# Altium PCB TIDA-010056.PcbDoc (part 1 of 4)
Units mil, origin at the board's own origin, x right, y up, seen from the top; angles counter-clockwise.
Board outline 2716.54 x 2756 mil, 4 copper layers (Top Layer, GND, PWR, Bottom Layer), stack 63.2 mil thick; 152 components, 93 nets, 418 pads, 601 vias.
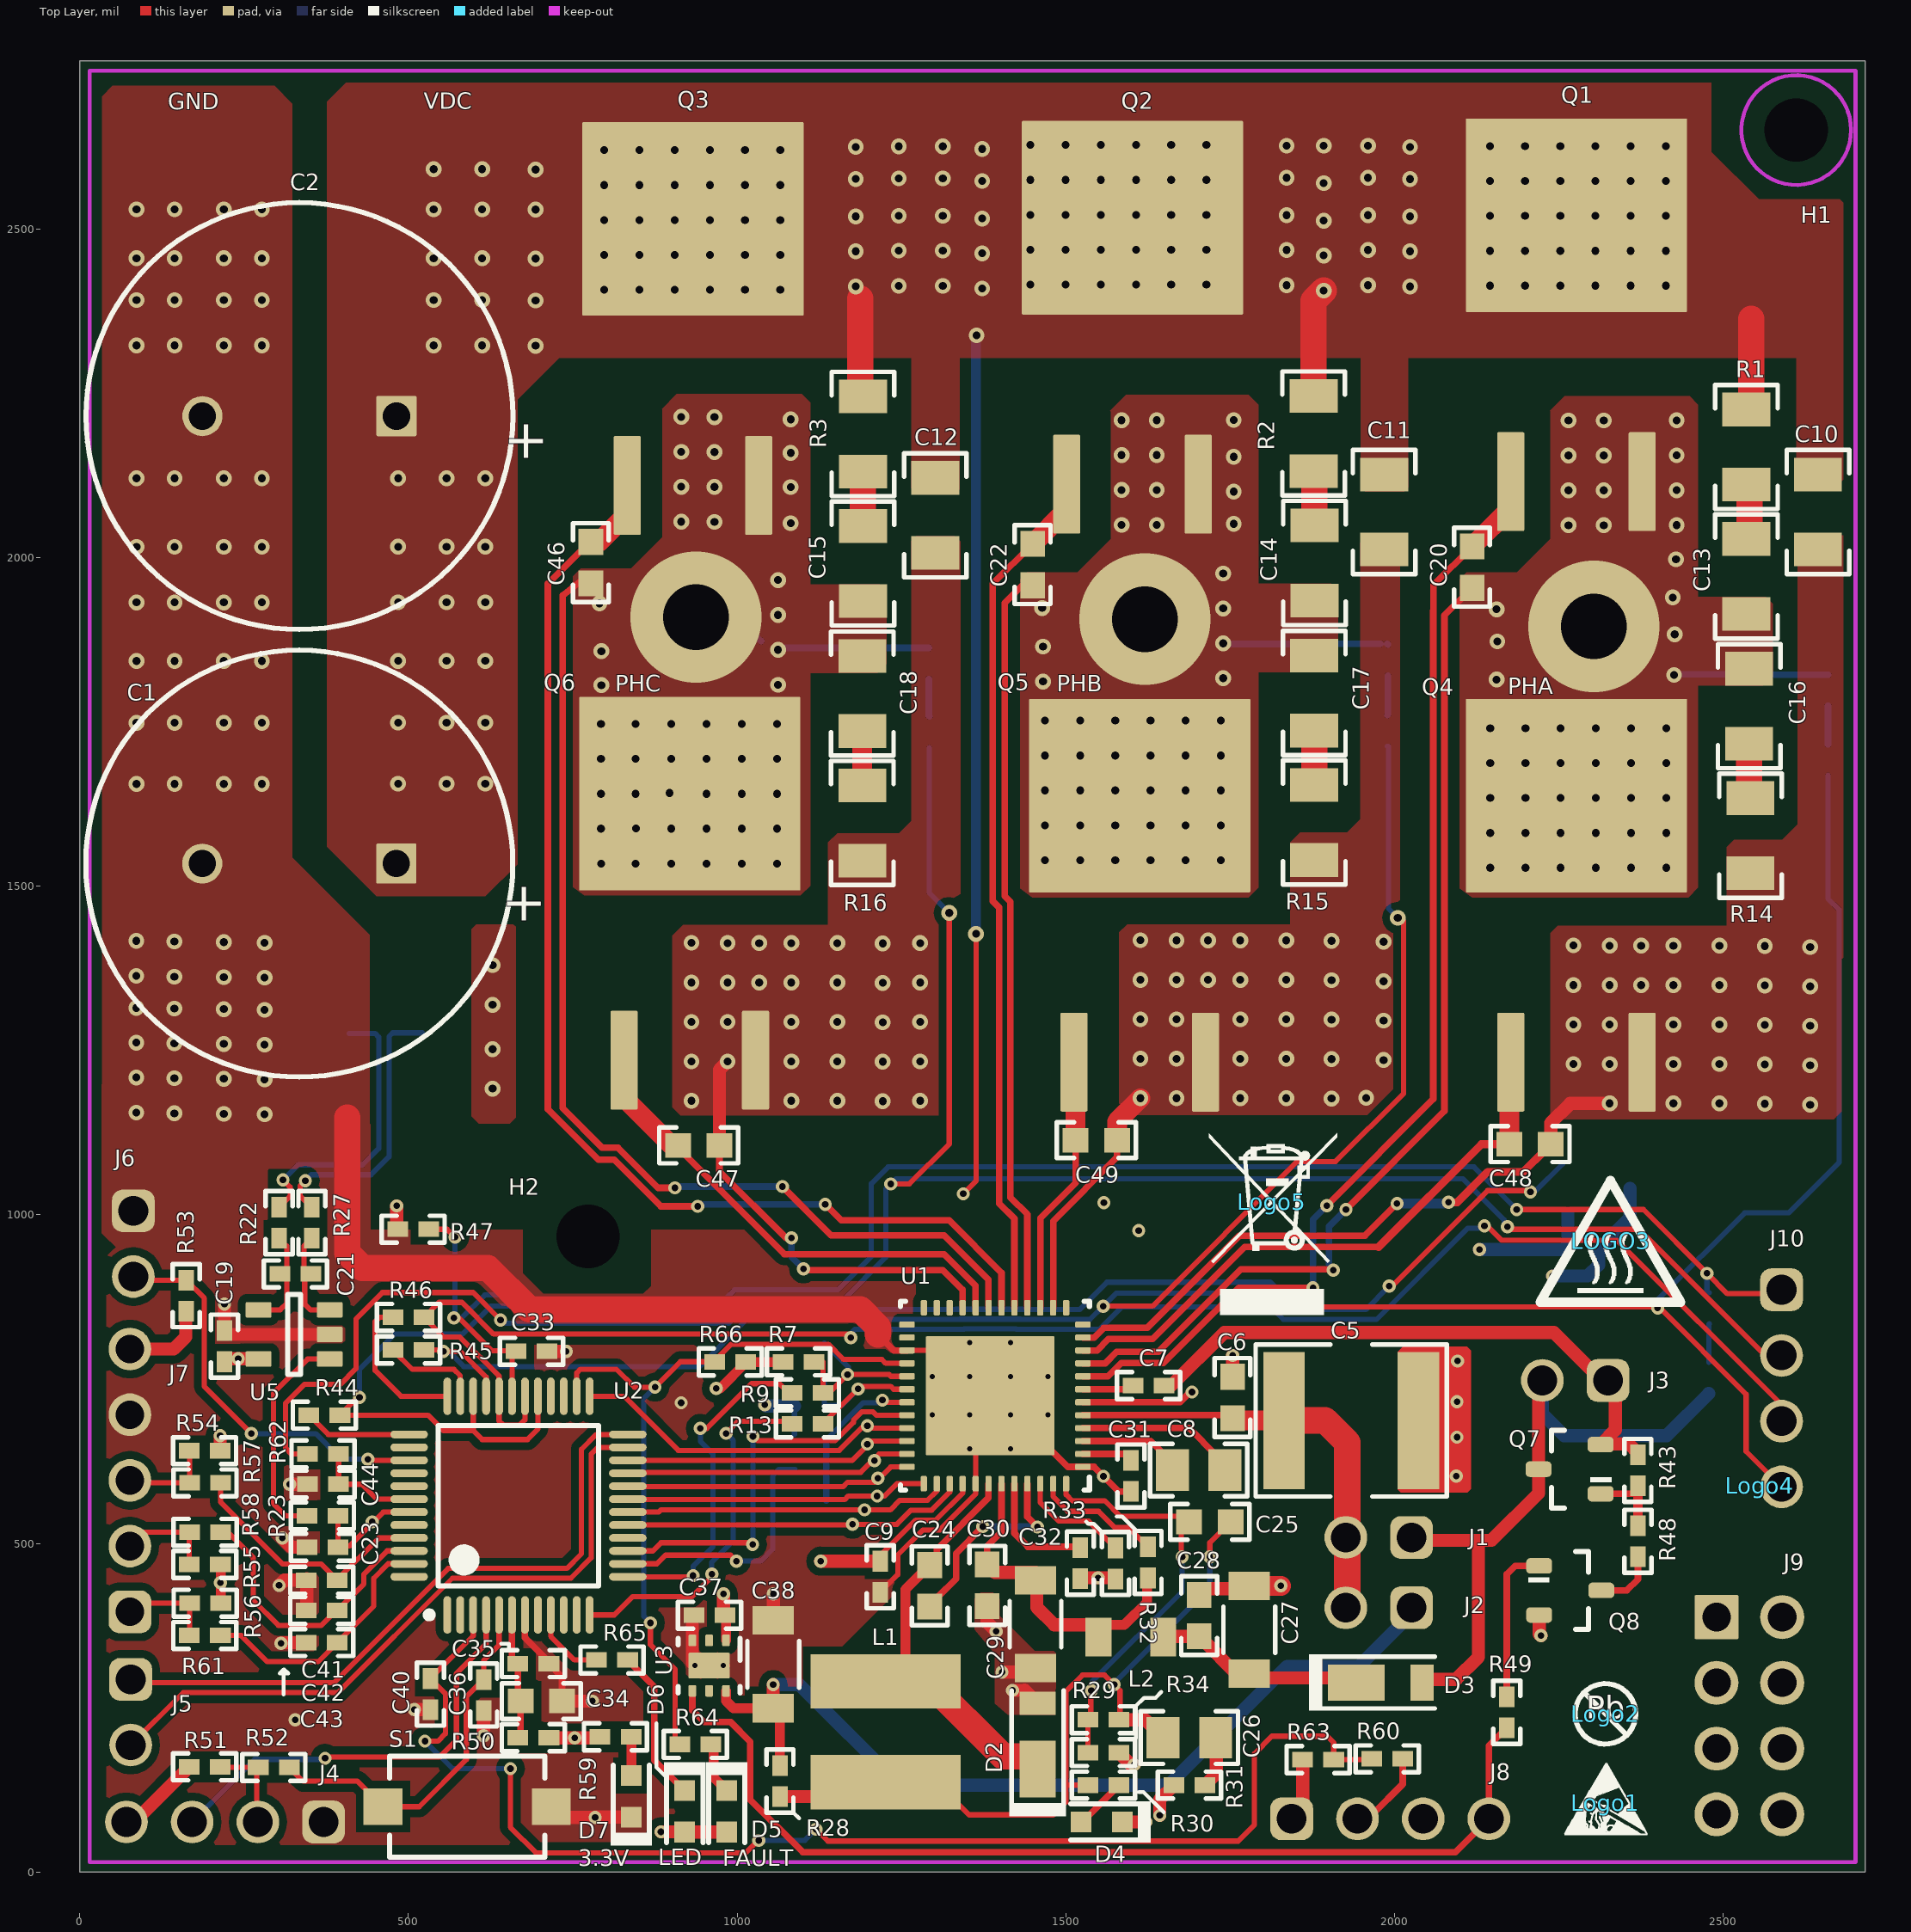
[diagram p0: Top Layer view]
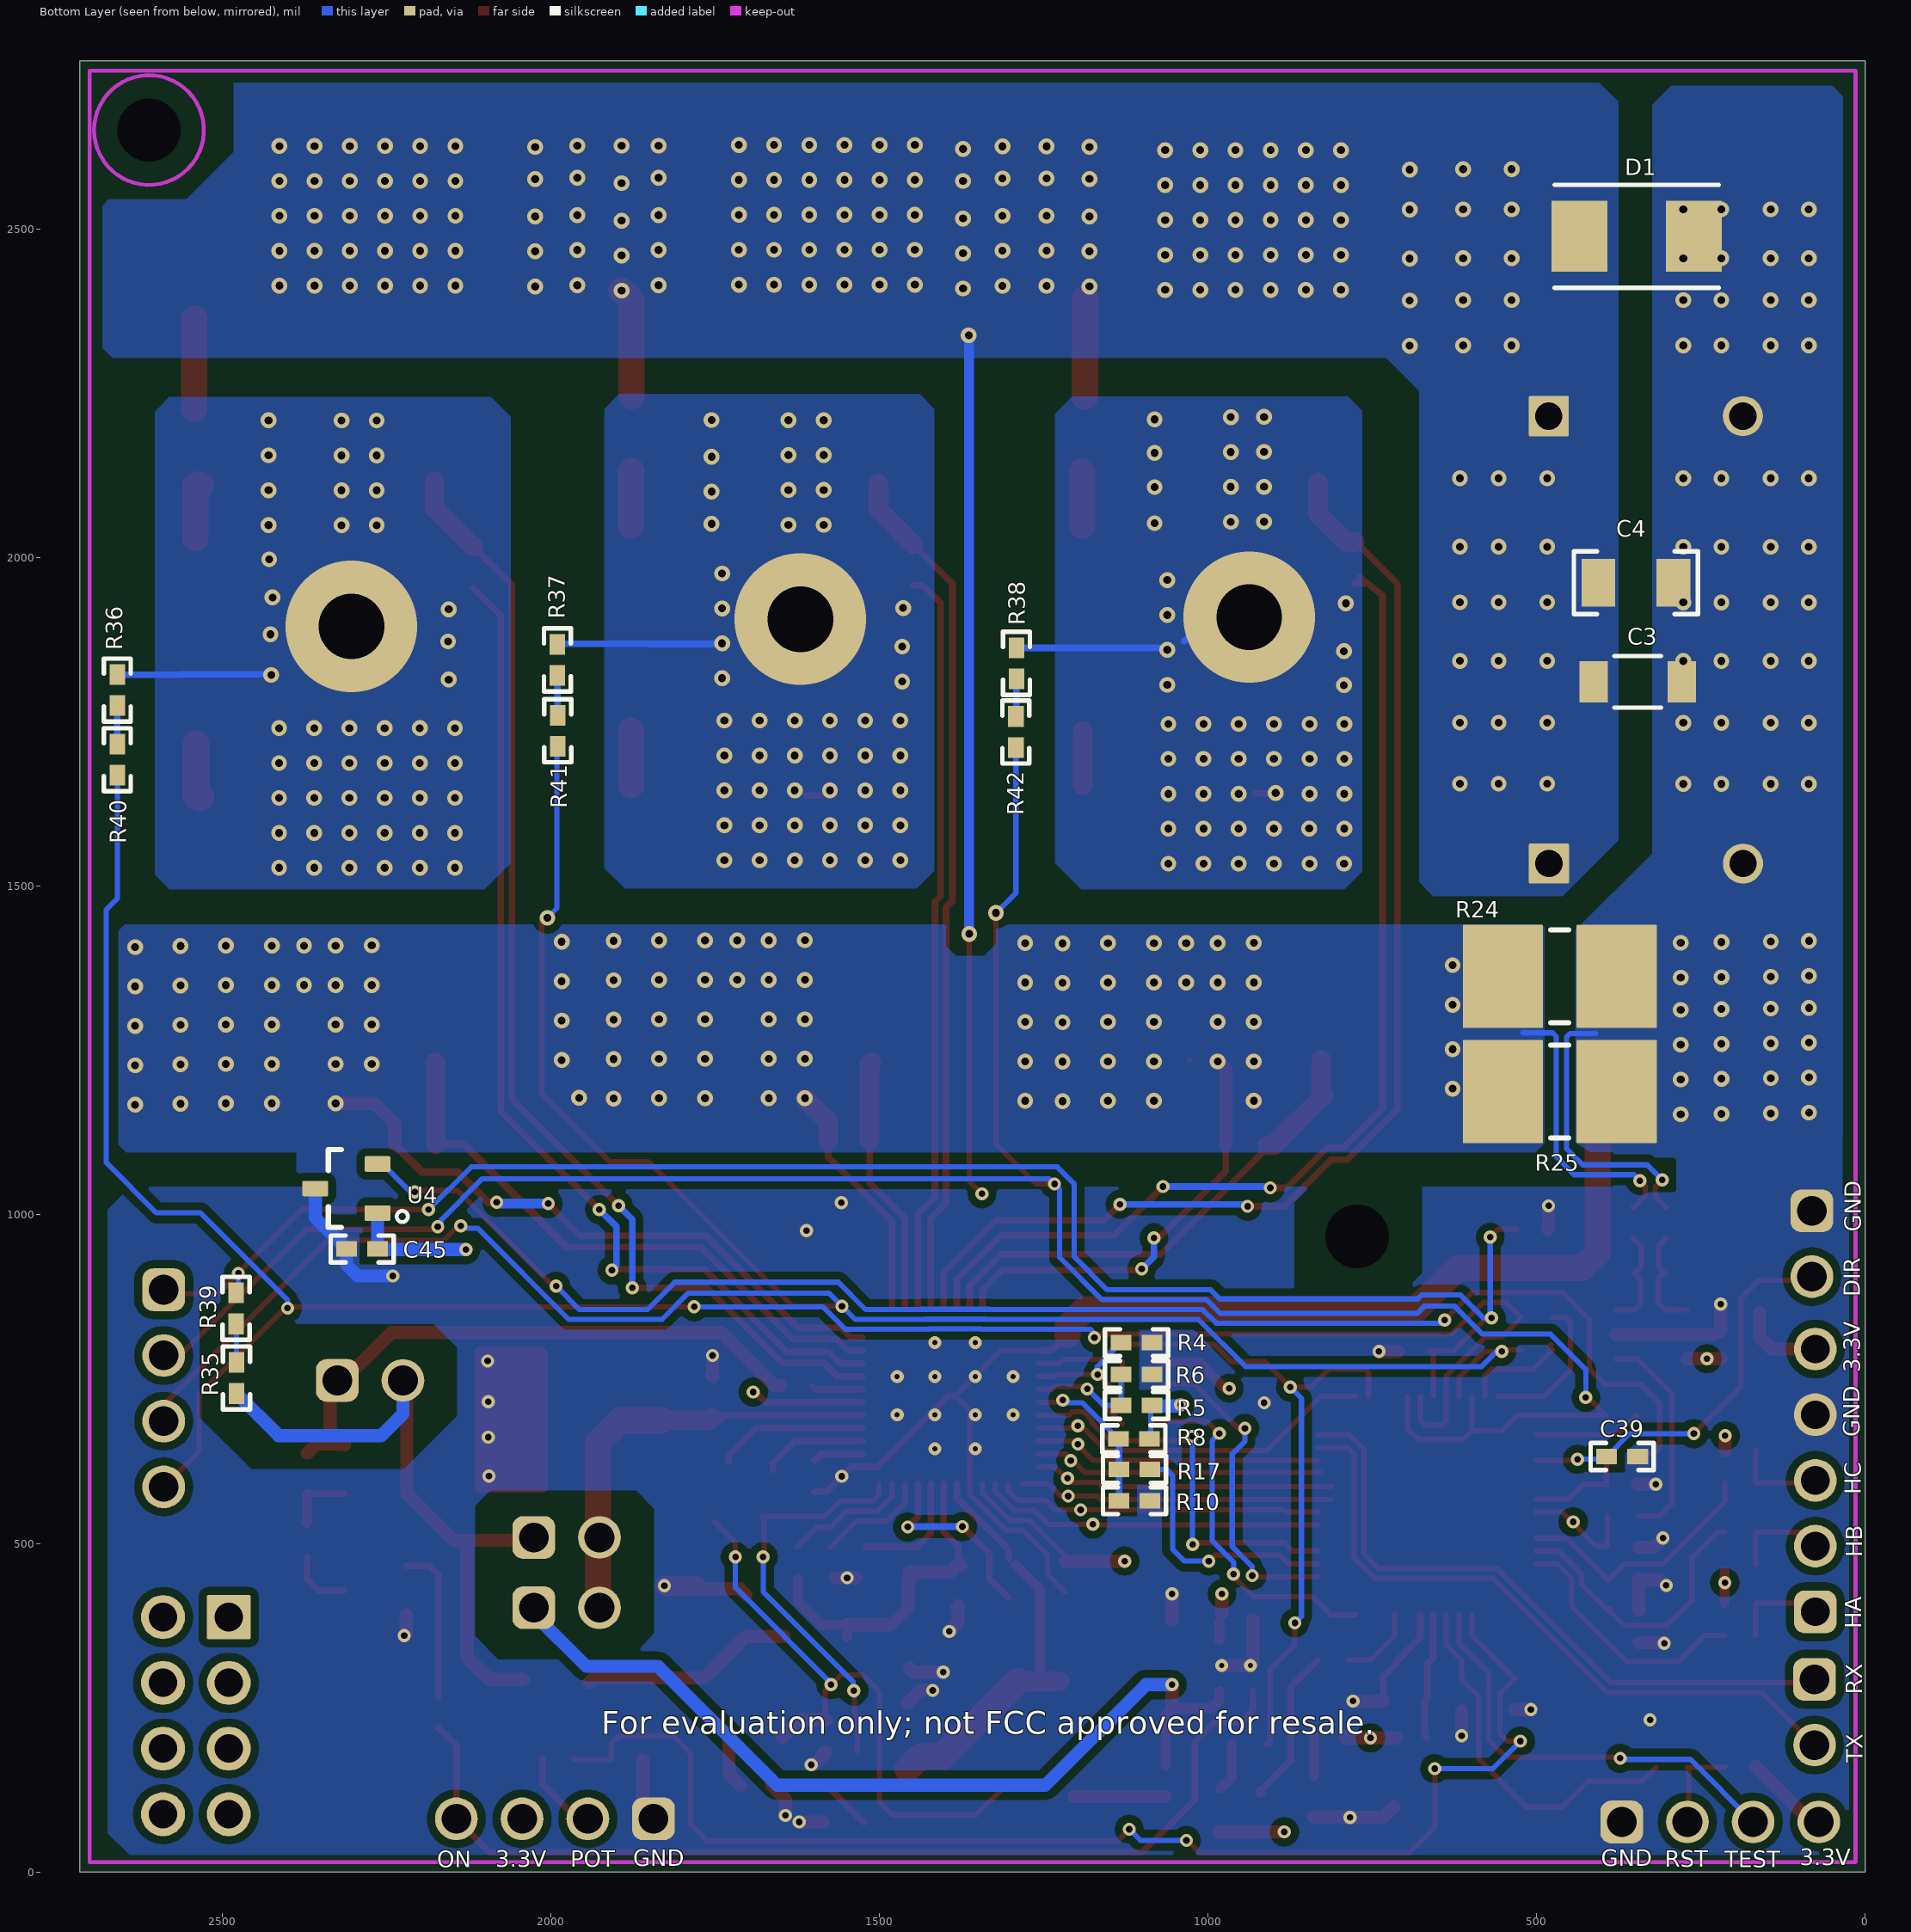
[diagram p1: Bottom Layer view, seen from below]
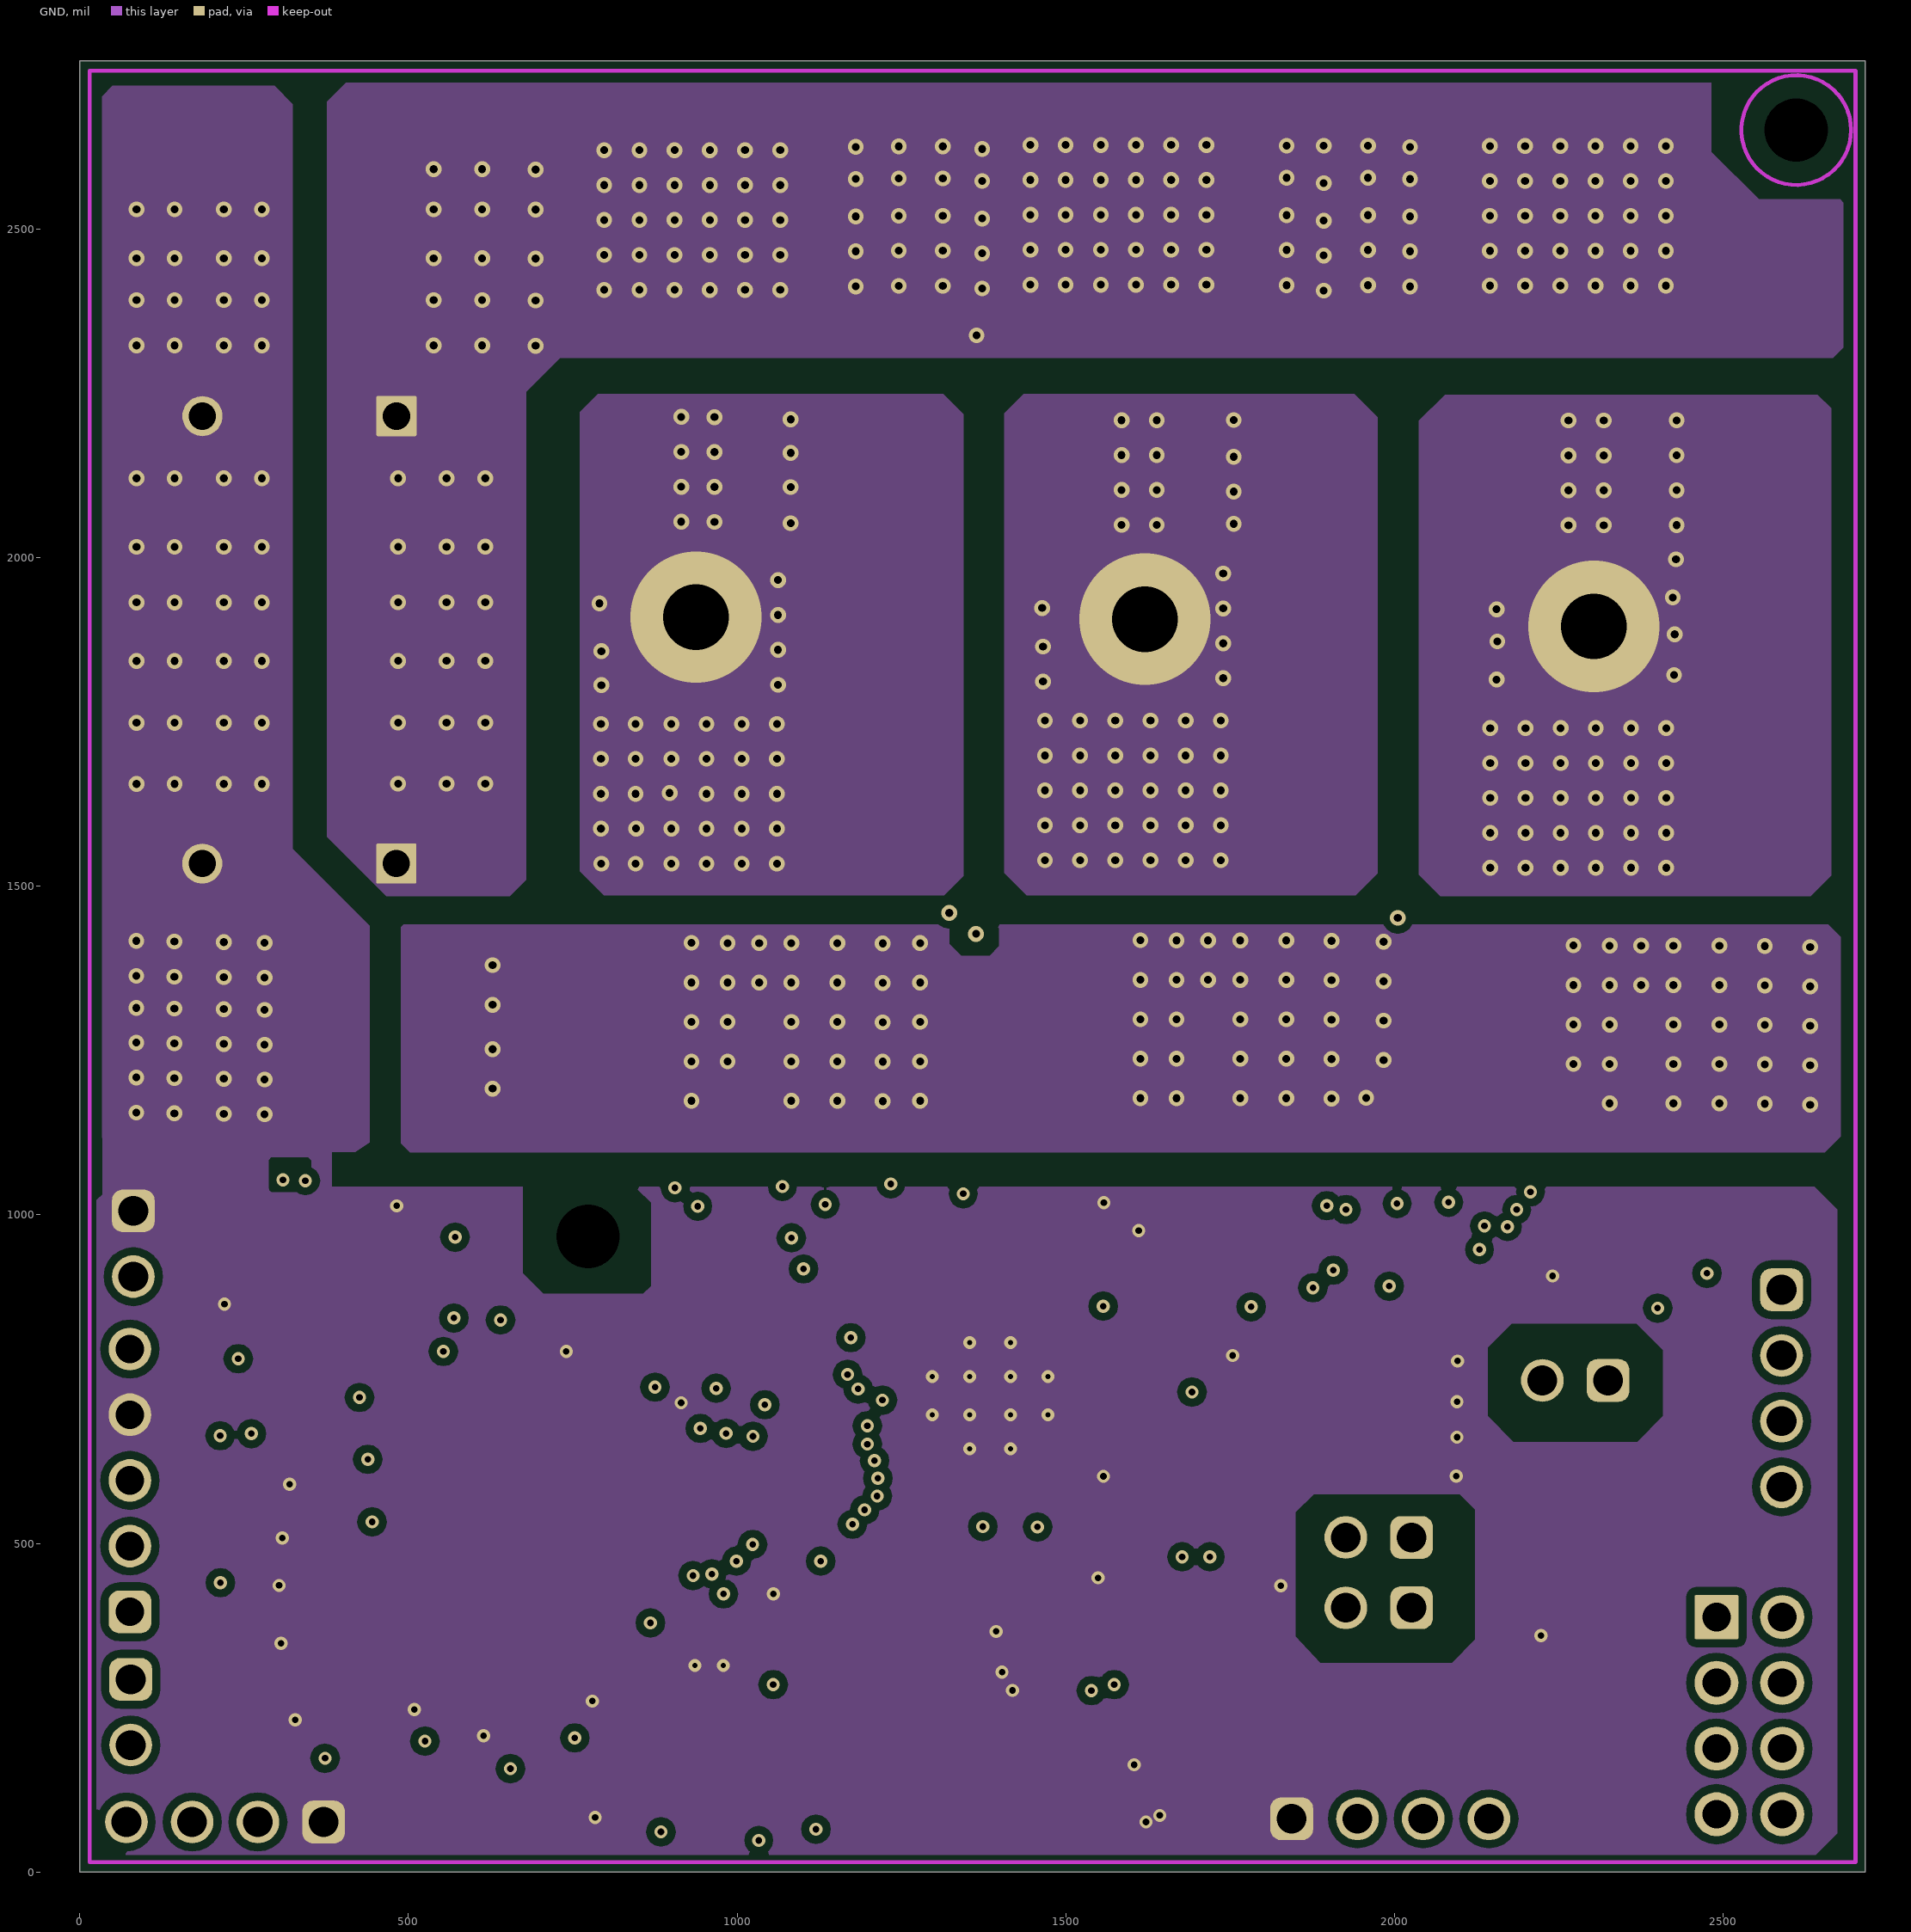
[diagram p2: GND]
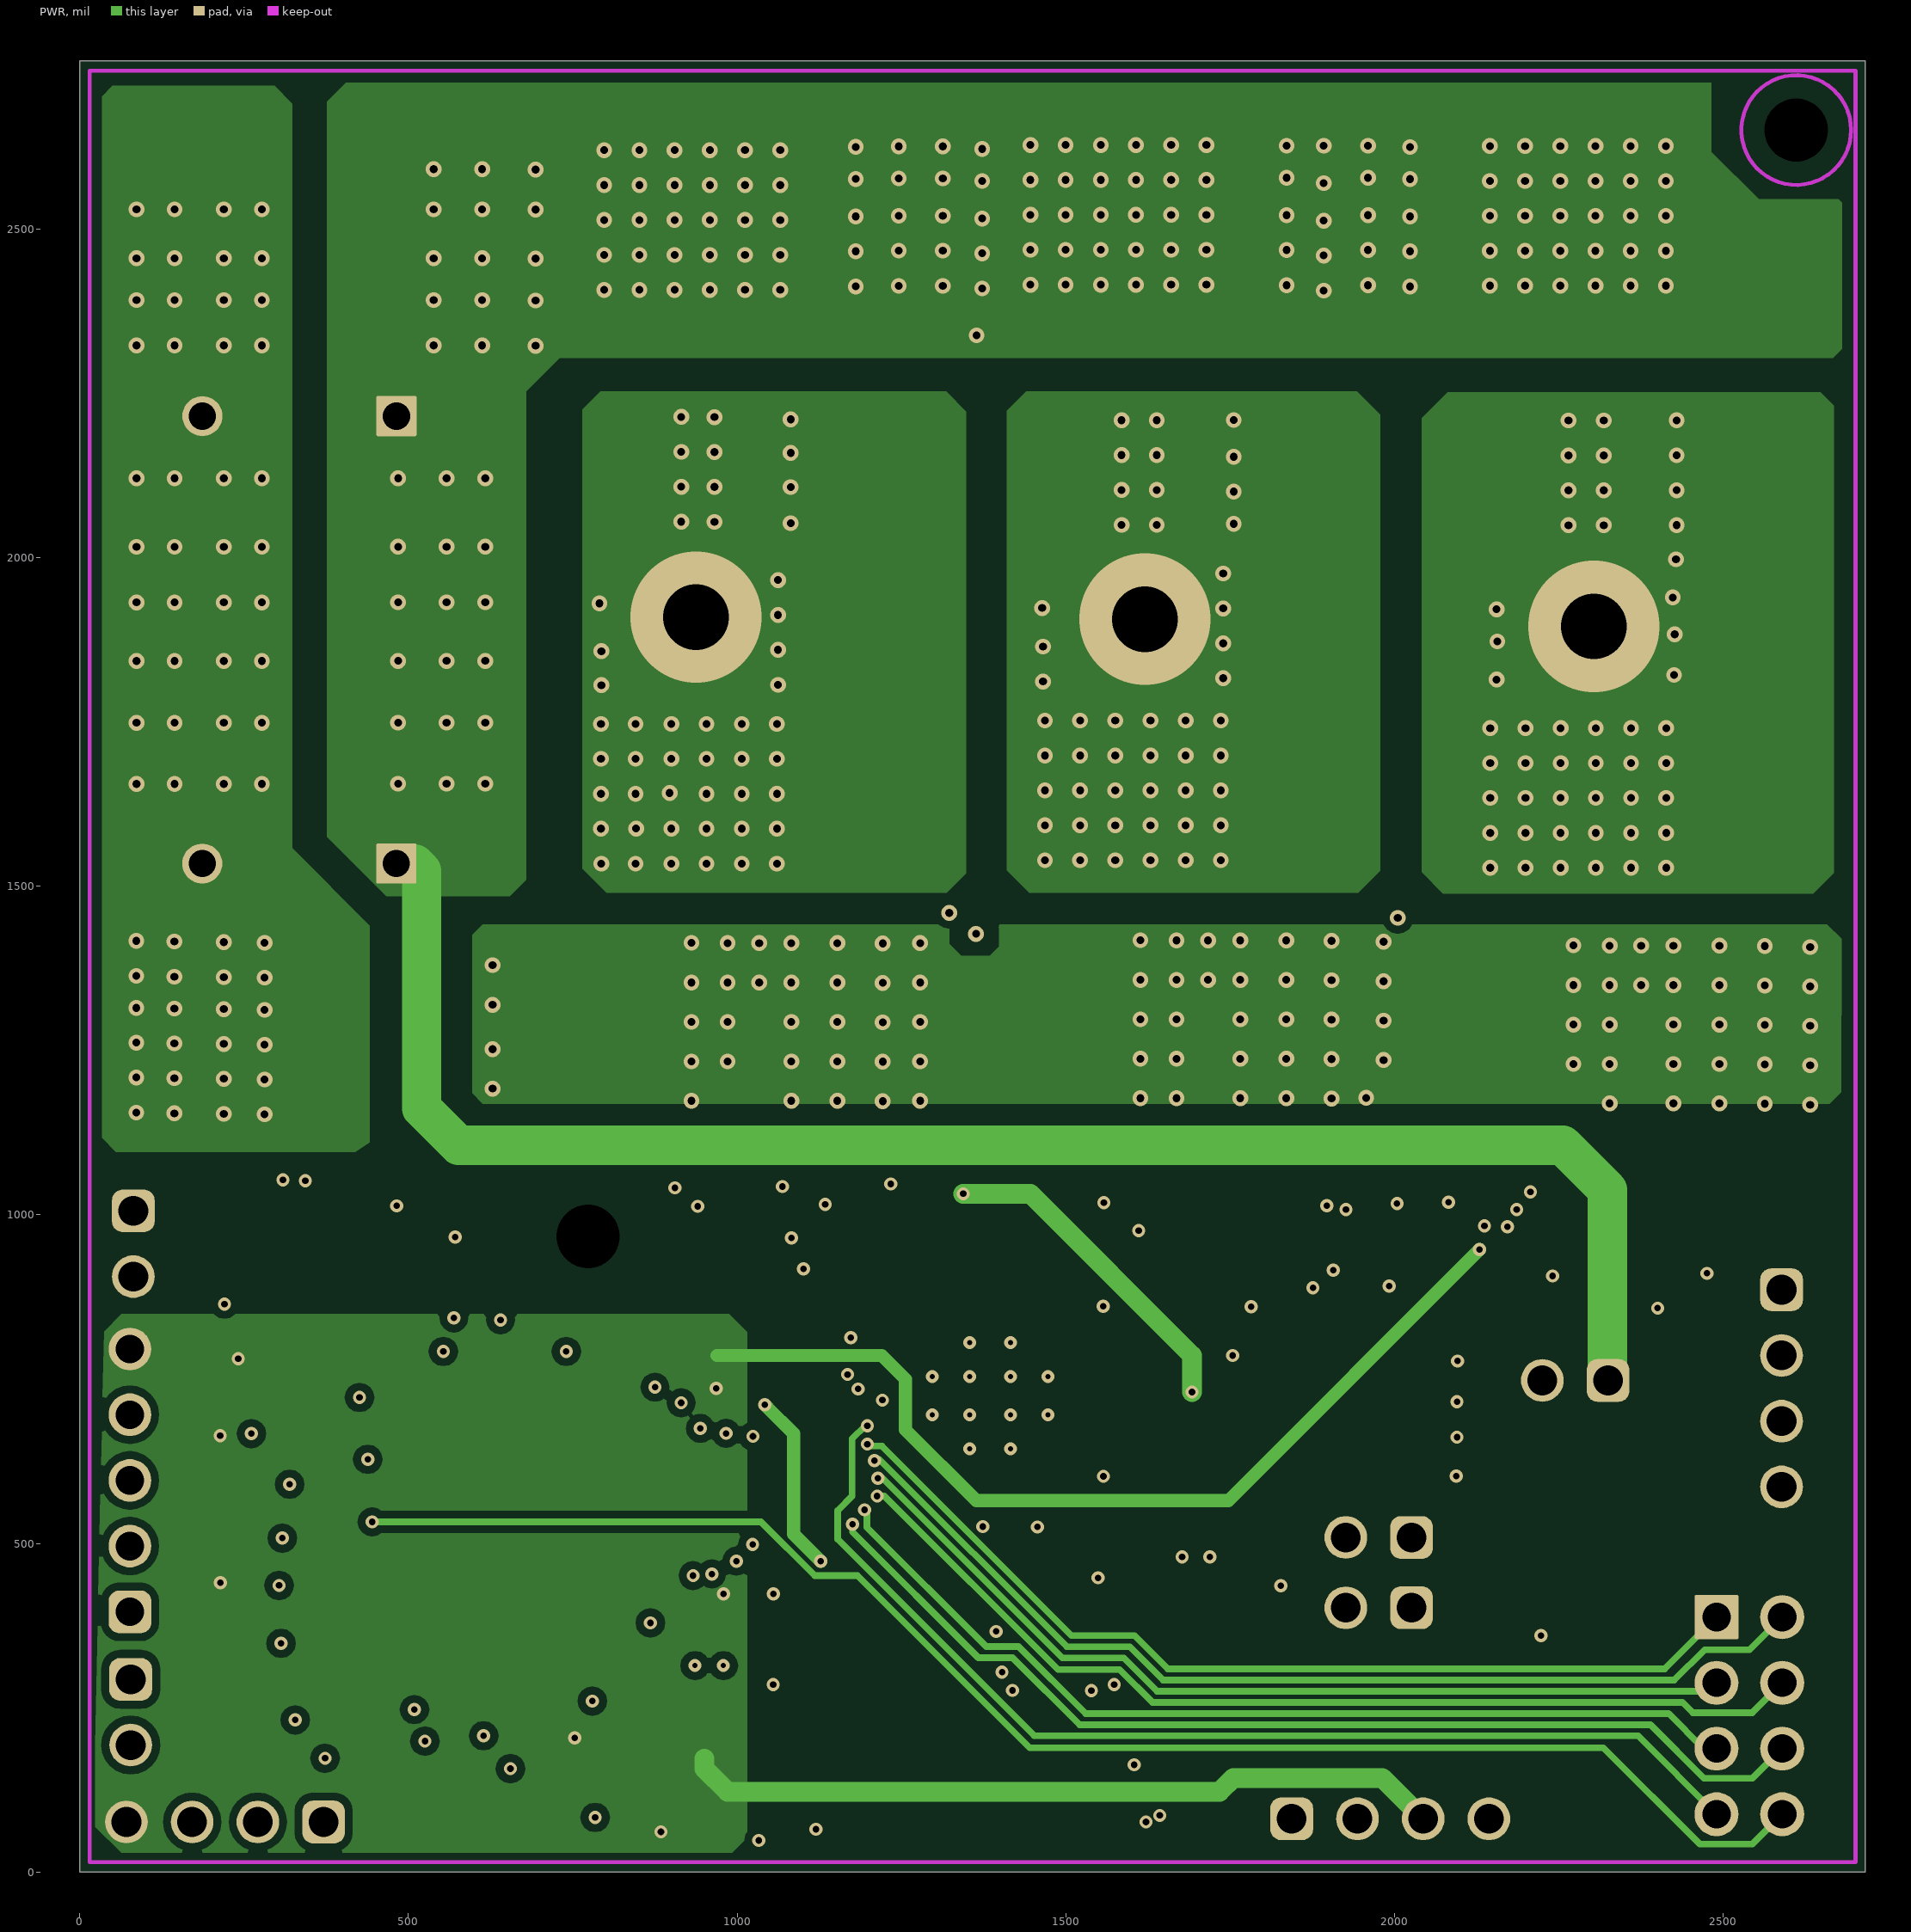
[diagram p3: PWR]

## Layer stack, top to bottom
Top Solder: solder mask 0.4, Solder Resist, Dk 3.5
Top Layer: signal copper 2.8
Dielectric1: core 20, FR-4 High Tg, Dk 4.2
GND: signal copper 2.8
Dielectric 3: prepreg 12, FR-4 High Tg, Dk 4.2
PWR: signal copper 2.8
Dielectric 2: core 20, FR-4 High Tg, Dk 4.2
Bottom Layer: signal copper 2.8
Bottom Solder: solder mask 0.4, Solder Resist, Dk 3.5

## Board outline
0,0 2716.54,0 2716.54,2756 0,2756

## Design rules (kind name [scope] priority, off if disabled: settings)
AcuteAngle [All] p1: minimum=4.50000000000000E+0001 checktracksonly=FALSE
AssemblyTestPointUsage [All] p1: valid=2
Clearance Clearance_u1 [InPadClass('U1')] p1: gap=7.7 ignorepadtopadclearanceinfootprint=FALSE except(0: Arc-Hole Track-Hole SMDPad-Hole THPad-Hole Via-Hole Fill-Hole Poly-Hole Region-Hole Text-Hole)
Clearance Clearance_Boardedge_poly [OnCopper and InPolygon vs IsKeepOut] p2: gap=5 ignorepadtopadclearanceinfootprint=FALSE except(0: Arc-Hole Track-Hole SMDPad-Hole THPad-Hole Via-Hole Fill-Hole Poly-Hole Region-Hole Text-Hole)
Clearance Clearance_MTG_COPPER [InPadClass('MTG') vs InPolygon] p3: gap=40 ignorepadtopadclearanceinfootprint=FALSE except(0: Arc-Hole Track-Hole SMDPad-Hole THPad-Hole Via-Hole Fill-Hole Poly-Hole Region-Hole Text-Hole)
Clearance "Shape to Shape" [InPolygon vs InPolygon] p4: gap=20 ignorepadtopadclearanceinfootprint=FALSE except(0: Arc-Hole Track-Hole SMDPad-Hole THPad-Hole Via-Hole Fill-Hole Poly-Hole Region-Hole Text-Hole)
Clearance "shape to all" [InPolygon] p5: gap=12 ignorepadtopadclearanceinfootprint=FALSE except(0: Arc-Hole Track-Hole SMDPad-Hole THPad-Hole Via-Hole Fill-Hole Poly-Hole Region-Hole Text-Hole)
Clearance "Clearance_via_thr pin" [IsVia vs IsThruPin] p6: gap=8 ignorepadtopadclearanceinfootprint=FALSE except(0: Arc-Hole Track-Hole SMDPad-Hole THPad-Hole Via-Hole Fill-Hole Poly-Hole Region-Hole Text-Hole)
Clearance [All] p7: gap=7 ignorepadtopadclearanceinfootprint=FALSE except(0: Arc-Hole Track-Hole SMDPad-Hole THPad-Hole Via-Hole Fill-Hole Poly-Hole Region-Hole Text-Hole)
DiffPairsRouting DiffPair_DiffPairsRouting [InDifferentialPair ('kan')] p1: maxlimit=10 minlimit=10 mostfreqgap=10 toplayer_minwidth=15 toplayer_maxwidth=15 toplayer_prefwidth=15 midlayer1_minwidth=15 midlayer1_maxwidth=15 midlayer1_prefwidth=15 midlayer2_minwidth=15 midlayer2_maxwidth=15 midlayer2_prefwidth=15 bottomlayer_minwidth=15 bottomlayer_maxwidth=15 bottomlayer_prefwidth=15 maxuncoupledlength=500
DiffPairsRouting DiffPair_DiffPairsRouting_1 [InDifferentialPair ('kan')] p2: maxlimit=10 minlimit=10 mostfreqgap=10 toplayer_minwidth=15 toplayer_maxwidth=15 toplayer_prefwidth=15 midlayer1_minwidth=15 midlayer1_maxwidth=15 midlayer1_prefwidth=15 midlayer2_minwidth=15 midlayer2_maxwidth=15 midlayer2_prefwidth=15 bottomlayer_minwidth=15 bottomlayer_maxwidth=15 bottomlayer_prefwidth=15 maxuncoupledlength=500
DiffPairsRouting [All] p3: maxlimit=100 minlimit=10 mostfreqgap=10 toplayer_minwidth=15 toplayer_maxwidth=15 toplayer_prefwidth=15 midlayer1_minwidth=15 midlayer1_maxwidth=15 midlayer1_prefwidth=15 midlayer2_minwidth=15 midlayer2_maxwidth=15 midlayer2_prefwidth=15 bottomlayer_minwidth=15 bottomlayer_maxwidth=15 bottomlayer_prefwidth=15 maxuncoupledlength=1000
FabricationTestPointUsage TestPointUsage [All] p1: valid=2 allowmultiple=FALSE
FabricationTestpoint Testpoint [All] p1: side=3 testpointundercomponent=TRUE minsize=40 maxsize=100 preferedsize=60 minholesize=0 maxholesize=40 preferedholesize=32 testpointgrid=1 allowsidetop=TRUE allowsidebottom=TRUE usegrid=TRUE gridtolerance=0.01
FanoutControl Fanout_LCC [IsLCC] p1: bgadir=Out bgaviamode=Centered fanoutstyle=Auto fanoutdirection=Alternating viagrid=1 // Fanout_LCC (Default Rule)
FanoutControl Fanout_BGA [IsBGA] p2: bgadir=Out bgaviamode=Centered fanoutstyle=Auto fanoutdirection=Alternating viagrid=1 // Fanout_BGA (Default Rule)
FanoutControl Fanout_Default [All] p4: bgadir=Out bgaviamode=Centered fanoutstyle=Auto fanoutdirection=Alternating viagrid=1 // Fanout_Default (Default Rule)
FanoutControl Fanout_Small [(CompPinCount < 5)] p5: bgadir=Out bgaviamode=Centered fanoutstyle=Auto fanoutdirection=OutThenIn viagrid=1 // Fanout_Small (Default Rule)
HoleSize [All] p1: absolutevalues=TRUE maxlimit=1000 minlimit=7 maxpercent=80.000 minpercent=20.000
MatchedLengths DiffPair_MatchedLengths [InDifferentialPair ('kan')] p1: tolerance=1000 checknetsindiffpair=TRUE checkdiffpairvsdiffpair=FALSE checkxsignals=FALSE checkothers=FALSE
MatchedLengths DiffPair_MatchedLengths_1 [InDifferentialPair ('kan')] p2: tolerance=1000 checknetsindiffpair=TRUE checkdiffpairvsdiffpair=FALSE checkxsignals=FALSE checkothers=FALSE
MinimumAnnularRing [All] p1: minimumring=5
MinimumAnnularRing MinimumAnnularRing_ThermalPadVias [IsVia and InAnyComponent] p2: minimumring=5.91
MinimumSolderMaskSliver MinimumSolderMaskSliver_Logo [InComponentClass('Logo') vs InComponentClass('Logo')] p1: minsoldermaskwidth=0.7
MinimumSolderMaskSliver [All] p2: minsoldermaskwidth=3.94
PlaneClearance [All] p1: clearance=15
PolygonConnect [All] p1: connectstyle=Direct reliefconductorwidth=10 reliefentries=4 polygonreliefangle="90 Angle" airgapwidth=10
RoutingVias RoutingVias_power [InNetClass('POWER')] p1: holewidth=16 width=32 viastyle="Through Hole" minholewidth=7.87 minwidth=19.68 maxholewidth=16 maxwidth=32
RoutingVias ThermalPadVias [IsVia and InAnyComponent] p2: holewidth=8 width=20 viastyle="Through Hole" minholewidth=7.87 minwidth=19 maxholewidth=12 maxwidth=24
RoutingVias [All] p3: holewidth=10 width=20 viastyle="Through Hole" minholewidth=7.87 minwidth=19.68 maxholewidth=100 maxwidth=200
SMDToCorner [All] p1: distance=30000
SilkToSilkClearance [All] p1: silktosilkclearance=5
SilkToSolderMaskClearance SilkscreenOverComponentPads [IsPad] p1: minsilkscreentomaskgap=0 clearancetoexposedcopper=TRUE
SolderMaskExpansion [All] p1: expansion=3
Width Width_power [InNetClass('pwr')] p1: maxlimit=200 minlimit=10 preferedwidth=20
Width [All] p2: maxlimit=100 minlimit=6 preferedwidth=8 checkconnectedcopper=TRUE
17 further rules are at their usual default settings.

## Classes and differential pairs
component class TIDA-010056_Page2: C34 C35 C36 C37 C38 C39 C40 C41 C42 C43 C44 C45 C? D5 D6 D7 J4 J5 J6 J7 J8 J9 J10 R50 R51 R52 R53 R54 R55 R56 R57 R58 R59 R60 R61 R62 R63 R64 R65 R? S1 U2 U3 U4
component class TIDA-010056_Page1: C1 C2 C3 C4 C5 C6 C7 C8 C9 C10 C11 C12 C13 C14 C15 C16 C17 C18 C19 C20 C21 C22 C23 C24 C25 C26 C27 C28 C29 C30 C31 C32 C33 C46 C47 C48 C49 D1 D2 D3 D4 J1 J2 J3 L1 L2 Q1 Q2 Q3 Q4 Q5 Q6 Q7 Q8 R1 R2 R3 R4 R5 R6 R7 R8 R9 R10 R13 R14 R15 R16 R17 R22 R23 R24 R25 R27 R28 R29 R30 R31 R32 R33 R34 R35 R36 R37 R38 R39 R40 R41 R42 R43 R44 R45 R46 R47 R48 R49 R66 U1 U5
component class AssemblyNote: ZZ1 ZZ2 ZZ3 ZZ4
component class TIDA-010056_Hardware: H1 H2 H3 H4 Logo1 Logo2 LOGO3 Logo4 Logo5 U? ZZ1 ZZ2 ZZ3 ZZ4
pad class U1: U9-39 U9-40 U9-41
component class Header: J1 J2 J3 J4 J5 J6 J7 J8 J10

## Components (designator, comment, footprint, x,y, rotation, side; value= is the part's Value field where it differs from the comment)
C1 "EEU-FS2A391" YXJ_1600X2500 333.81,1534.49 r180 top value=390uF
C2 "EEU-FS2A391" YXJ_1600X2500 334.04,2215.49 r180 top value=390uF
C3 "C3216X7R2A104K160AA" 1206_180 346.38,1811 r180 bottom value=0.1uF
C4 "CL31B225KCHSNNE" 1206 349.12,1962 r180 bottom value=2.2uF
C5 "22201C106MAT2A" 2220_280 1934.19,687.09 r0 top value=10uF
C6 "GRM188R72A104KA35D" 0603 1753.64,722 r90 top value=0.1uF
C7 "CL05A105MO5NNNC" 0402 1626,740 r0 top value=1uF
C8 "GRM21BR72A473KA01L" 0805_HV 1702.19,611.54 r0 top value=0.047uF
C9 "GRM152R60J105ME15D" 0402 1217.64,449.2 r270 top value=1uF
C10 "CL31B225KCHSNNE" 1206 2644.45,2069.52 r270 top value=2.2uF
C11 "CL31B225KCHSNNE" 1206 1984.45,2069.52 r270 top value=2.2uF
C12 "CL31B225KCHSNNE" 1206 1301.45,2064.52 r270 top value=2.2uF
C13 "12061C392KAZ2A" 1206 2535.45,1971.52 r270 top value=3900pF
C14 "12061C392KAZ2A" 1206 1878.45,1992 r270 top value=3900pF
C15 "12061C392KAZ2A" 1206 1191.45,1991.26 r270 top value=3900pF
C16 "12061C392KAZ2A" 1206 2539.76,1774 r270 top value=3900pF
C17 "12061C392KAZ2A" 1206 1877.9,1794 r270 top value=3900pF
C18 "12061C392KAZ2A" 1206 1190.45,1793.26 r270 top value=3900pF
C19 "GCM155R71A104KA55D" 0402 220,800 r270 top value=0.1uF
C20 "885012206083" 0603 2118.02,1985.52 r270 top value=1000pF
C21 "GRM155R71H332KA01D" 0402 328,910 r180 top value=3300pF
C22 "885012206083" 0603 1449.45,1989.52 r270 top value=1000pF
C23 "GRM155R71C102KA01D" 0402 369,494 r180 top value=1000pF
C24 "885012206114" 0603 1293,435.46 r90 top value=0.01uF
C25 "GRM1885C1H302JA01D" 0603 1719.19,532.69 r180 top value=3000pF
C26 "C2012X7R1H225K125AC" 0805_HV 1688,204.38 r0 top value=2.2uF
C27 "C3216X7S2A335M160AB" 1206_190 1779.19,368.54 r90 top value=3.3uF
C28 "GRM188R72A104KA35D" 0603 1703,390 r90 top value=0.1uF
C29 "C3216X7S2A335M160AB" 1206_190 1454,377 r270 top value=3.3uF
C30 "GRM188R72A104KA35D" 0603 1380.47,436.19 r270 top value=0.1uF
C31 "CL05A105MO5NNNC" 0402 1599.19,602.54 r270 top value=1uF
C32 "CGB2A1X5R1C474K033BC" 0402 1522.19,470 r270 top value=0.47uF
C33 "GCM155R71A104KA55D" 0402 687.26,792.19 r0 top value=0.1uF
C34 "GRM188R61A106KE69D" 0603 702,260 r0 top value=10uF
C35 "GCM155R71A104KA55D" 0402 690,317 r0 top value=0.1uF
C36 "GRM155R71C102KA01D" 0402 614.31,269.23 r270 top value=1000pF
C37 "885012105013" 0402 958,390.46 r180 top value=2.2uF
C38 "C3216X7R1V106M160AC" 1206_190 1055,316 r90 top value=10uF
C39 "GCM155R71A104KA55D" 0402 370,632.09 r180 bottom value=0.1uF
C40 "GCM155R71A104KA55D" 0402 533.31,270.61 r270 top value=0.1uF
C41 "GRM155R71C102KA01D" 0402 368,444 r180 top value=1000pF
C42 "GRM155R71C102KA01D" 0402 368,398 r180 top value=1000pF
C43 "GRM155R71C102KA01D" 0402 368,349 r180 top value=1000pF
C44 "GCM155R71A104KA55D" 0402 370,590 r180 top value=0.1uF
C45 "GCM155R71A104KA55D" 0402 2287,948 r0 bottom value=0.1uF
C46 "885012206083" 0603 777.45,1992.52 r270 top value=1000pF
C47 "885012206083" 0603 941.45,1105.52 r0 top value=1000pF
C48 "885012206083" 0603 2206.45,1107.52 r0 top value=1000pF
C49 "885012206083" 0603 1546.45,1113.52 r0 top value=1000pF
D1 "SMBJ70CA-13-F" SMB-BI 348,2489 r0 bottom value=70V
D2 "DFLS1200-7" POWERDI123 1457.19,206.54 r90 top value=200V
D3 "DFLS1200-7" POWERDI123 1992,288.24 r0 top value=200V
D4 "LED_A2_K1" WL-SMCW_GREEN 1554.5,76 r180 top value=Green
D5 "150060GS75000" WL-SMCW_GREEN 984.29,92.2 r270 top value=RED
D6 "150060GS75000" WL-SMCW_GREEN 920.29,92.2 r270 top value=YELLOW
D7 "150060GS75000" WL-SMCW_GREEN 839,115 r90 top value=GREEN
H1 "NY PMS 256 0025 PH" "NY PMS 256 0025 PH" 2611.37,2650.8 r180 top
H2 "NY PMS 256 0025 PH" "NY PMS 256 0025 PH" 773.14,967 r180 top
J1 "61300211121" WURTH_61300211121 1976,509 r180 top
J2 "61300211121" WURTH_61300211121 1976,402 r180 top
J3 "61300211121" WURTH_61300211121 2275,748 r180 top
J4 "61300411121" WURTH_61300411121 220.81,76 r180 top
J5 "61300211121" WURTH_61300211121 77.31,243.07 r270 top
J6 "61300211121" WURTH_61300211121 81.29,956 r270 top
J7 "61300511121" Wurth_61300511121 76.16,595.81 r90 top
J8 "61300411121" WURTH_61300411121 1993.75,80.83 r0 top
J9 "61300821121" FP-61300821121_HDR8-MFG 2540,237.78 r270 top
J10 "61300411121" WURTH_61300411121 2589,736 r270 top
L1 "SDR0604-331KL" SDR0604 1226,213.22 r270 top value=330uH
L2 "Inductor_Iron" NLCV25 1599,357.49 r180 top value=33uH
Logo1 "ESD Susceptible" ESD_OVERLAY_SMALL 2321,105 r0 top
Logo2 "Pb-Free Symbol" PB-FREE_OVERLAY_SMALL 2321,240.54 r0 top
LOGO3 "CAUTION HOT SURFACE" IEC_HOTSURFACE_SMALL 2328.69,960 r0 top
Logo4 "FCC disclaimer" FCC_disclaimer 2555.85,587.85 r90 top
Logo5 "WEEE logo" WEEE_Minimum 1813.56,1019.85 r0 top
Q1 "CSD19536KTT" KTT0002A 2276.95,2387.39 r90 top value=100V
Q2 "CSD19536KTT" KTT0002A 1601.45,2383.52 r90 top value=100V
Q3 "CSD19536KTT" KTT0002A 932.76,2381.73 r90 top value=100V
Q4 "CSD19536KTT" KTT0002A 2276.95,1504 r90 top value=100V
Q5 "CSD19536KTT" KTT0002A 1612.45,1504 r90 top value=100V
Q6 "CSD19536KTT" KTT0002A 927.95,1506.9 r90 top value=100V
Q7 "FMMT593TA" SOT-23 2266.51,612.88 r180 top value="100 V"
Q8 "FMMT493TA" SOT-23 2267.51,428.4 r0 top value="100 V"
R1 "CRCW12061R50FKEA" 1206 2535.45,2168.52 r90 top value=1.50
R2 "CRCW12061R50FKEA" 1206 1877.13,2189 r90 top value=1.50
R3 "CRCW12061R50FKEA" 1206 1191.45,2188.26 r90 top value=1.50
R4 "RC0402JR-070RL" 0402 1109,805.39 r180 bottom value=0
R5 "CRCW040275K0JNED" 0402 1109,710.11 r0 bottom value=75k
R6 "ERJ-2RKF1802X" 0402 1109,757.08 r0 bottom value=18.0k
R7 "ERJ-2RKF1002X" 0402 1093.49,776.38 r180 top value=10.0k
R8 "ERJ-2RKF1802X" 0402 1113,659 r0 bottom value=18.0k
R9 "ERJ-2GEJ101X" 0402 1107,728.91 r0 top value=100
R10 "CRCW040275K0JNED" 0402 1112,565 r0 bottom value=75k
R13 "ERJ-2GEJ101X" 0402 1107,682 r0 top value=100
R14 "CRCW12061R50FKEA" 1206 2541.76,1577 r90 top value=1.50
R15 "CRCW12061R50FKEA" 1206 1877.9,1597 r90 top value=1.50
R16 "CRCW12061R50FKEA" 1206 1190.45,1596.26 r90 top value=1.50
R17 "ERJ-2GEJ101X" 0402 1112,612.61 r0 bottom value=100
R22 "CRCW040210R0FKED" 0402 353,988 r270 top value=10.0
R23 "ERJ-2GEJ101X" 0402 369,542 r0 top value=100
R24 "CRE2512-FZ-R001E-3" CRE2512-R1_R4 465,1362.89 r0 bottom value=0.001
R25 "CRE2512-FZ-R001E-3" CRE2512-R1_R4 465,1187.63 r0 bottom value=0.001
R27 "CRCW040210R0FKED" 0402 303.12,988 r270 top value=10.0
R28 "RC0402JR-070RL" 0402 1065,138.35 r90 top value=0
R29 "CRCW040220K0FKED" 0402 1557.17,231.54 r0 top value=20.0k
R30 "CRCW040220K0FKED" 0402 1557.19,132 r180 top value=20.0k
R31 "ERJ-2BQFR91X" 0402 1688,132 r0 top value=0.91
R32 "RC0402FR-07249KL" 0402 1625,471 r90 top value=249k
R33 "AC0402FR-07133KL" 0402 1575.48,469.54 r90 top value=133k
R34 "RC0402FR-074K02L" 0402 1557.19,181.54 r180 top value=4.02k
R35 "CRCW04022M00FKED" 0402 2478.27,751.62 r270 bottom value=2.00Meg
R36 "RC0402FR-07249KL" 0402 2659.64,1798.52 r90 bottom value=249k
R37 "RC0402FR-07249KL" 0402 1989.93,1844.35 r90 bottom value=249k
R38 "RC0402FR-07249KL" 0402 1291.57,1839.2 r90 bottom value=249k
R39 "CRCW04022M00FKED" 0402 2479,857.62 r270 bottom value=2.00Meg
R40 "RC0402FR-07249KL" 0402 2659.64,1692.52 r90 bottom value=249k
R41 "RC0402FR-07249KL" 0402 1989.45,1736.73 r90 bottom value=249k
R42 "RC0402FR-07249KL" 0402 1292.45,1734.85 r90 bottom value=249k
R43 "ERJ-2RKF9762X" 0402 2370.32,611.07 r90 top value=97.6k
R44 "RC0402FR-0723K2L" 0402 372,695.15 r0 top value=23.2k
R45 "RC0402FR-0723K2L" 0402 500,794.38 r0 top value=23.2k
R46 "RC0402FR-0723K2L" 0402 500,843.99 r0 top value=23.2k
R47 "ERJ-2RKF1913X" 0402 507,978 r0 top value=191k
R48 "CRCW04022M00FKED" 0402 2370.57,503.07 r90 top value=2.00Meg
R49 "ERJ-2RKF3301X" 0402 2171,243 r270 top value=3.30k
R50 "CRCW04023R32FKED" 0402 690,204.24 r180 top value=3.32
R51 "RC0402FR-0747KL" 0402 190,160 r180 top value=47.0k
R52 "ERJ-2GEJ101X" 0402 295,159 r0 top value=100
R53 "CRCW04022M00FKED" 0402 161.74,877 r270 top value=2.00Meg
R54 "ERJ-2RKF3301X" 0402 189.74,641 r0 top value=3.30k
R55 "ERJ-2RKF3301X" 0402 190.16,468 r0 top value=3.30k
R56 "ERJ-2RKF3301X" 0402 190.78,408.81 r0 top value=3.30k
R57 "ERJ-2GEJ101X" 0402 190.37,592 r0 top value=100
R58 "ERJ-2GEJ101X" 0402 190.54,516.79 r0 top value=100
R59 "ERJ-2RKF1001X" 0402 815,205.66 r180 top value=1.00k
R60 "ERJ-2RKF1002X" 0402 1989,172 r0 top value=10.0k
R61 "ERJ-2GEJ101X" 0402 190.16,359.81 r0 top value=100
R62 "ERJ-2RKF1002X" 0402 370,636 r180 top value=10.0k
R63 "ERJ-2RKF1004X" 0402 1884,171 r0 top value=1.00Meg
R64 "ERJ-2RKF1001X" 0402 936.35,194.12 r0 top value=1.00k
R65 "ERJ-2RKF1001X" 0402 809.71,322.47 r0 top value=1.00k
R66 "ERJ-2RKF1002X" 0402 989.53,776 r0 top value=10.0k
S1 "434121025816" SW_434121025816 589.05,99.35 r180 top
U1 "DRV8350RHRGZR" RGZ0048L 1392.29,724.68 r180 top locked
U2 "MSP430FR2355TPTR" PT0048A_N 667.31,557.46 r90 top
U3 "TPS70933DRVR" DRV0006A 957.45,313.95 r270 top
U4 "TMP235A4DBZR" DBZ0003A_N 2311,1040 r0 bottom
U5 "INA180A3IDBV" DBV0005A_N 326,818 r180 top
ZZ1 "This Assembly Note is for PCB labels only" AssemblyNoteLabel -95,3553 r0 top
ZZ2 "These assemblies are ESD sensitive, ESD precautions shall be observed." AssemblyNote -95,3453 r0 top
ZZ3 "These assemblies must be clean and free from flux and all contaminants. Use of no clean flux is not acceptable." AssemblyNote -95,3340 r0 top
ZZ4 "These assemblies must comply with workmanship standards IPC-A-610 Class 2, unless otherwise specified." AssemblyNote -95,3250 r0 top

## Footprints (in the part's own frame and the unit in brackets; to place one, negate y for a bottom-side part, rotate by r counter-clockwise, add the part's x,y. Pads: shape width x height; smd on the part's side, far side on the other; paste and mask are expansions set on the pad)
0402 [mm] "0402 from SM-752 data"
  rect 0.8x0.6 smd: 1(-0.6,0) 2(0.6,0)
  silkscreen extent -1.22,-0.52 1.22,0.52, body extent -0.55,-0.3 0.55,0.3, height 0.6
0603 [mm] "0603 from SM-752 data"
  rect 1x0.95 smd: 1(-0.8,0) 2(0.8,0)
  silkscreen extent -1.52,-0.69 1.52,0.69, body extent -0.87,-0.47 0.87,0.47, height 1
0805_HV [mil] "0805 with 30mil clearance between pads"
  rect 50x63 smd: 1(-40,0) 2(40,0)
  silkscreen extent -74,-40 74,40, body extent -43,-29 43,29, height 57
1206 [mm] "1206 from SM-752 data"
  rect 1.3x1.85 smd: 1(-1.45,0) 2(1.45,0)
  silkscreen extent -2.4,-1.21 2.4,1.21, body extent -1.7,-0.9 1.7,0.9, height 1.35
1206_180 [mm] "1206_180"
  rect 1.1x1.6 smd: 1(-1.7,0) 2(1.7,0)
  silkscreen extent -0.9,-1 0.9,1, body extent -1.75,-0.95 1.75,0.95, height 1.8
1206_190 [mm] "1206_190"
  rect 1.1x1.6 smd: 1(-1.7,0) 2(1.7,0)
  silkscreen extent -0.9,-1 0.9,1, body extent -1.75,-0.95 1.75,0.95, height 1.9
2220_280 [mm] "Chip Capacitor, Body 5.7x5.0mm, IPC Medium Density"
  rect 1.6x5.3 smd: 1(-2.6,0) 2(2.6,0)
  silkscreen extent -3.69,-2.94 3.69,2.94, body extent -2.95,-2.62 2.95,2.62, height 2.8
AssemblyNote [mil] "Assembly Note"
AssemblyNoteLabel [mil] "Assembly Note for PCB Labels"
CRE2512-R1_R4 [mm] "SMD, 2-Leads, Body 6.45x3.35mm"
  rrect3% 3.1x4 smd: 1(-2.2,0) 2(2.2,0)
  silkscreen extent -0.35,-1.8 0.35,1.8, body extent -3.32,-1.77 3.33,1.78, height 0.9
DBV0005A_N [mm] "SOT23, 5-Leads, Body 2.9x1.6mm, Pitch 0.95mm, Lead Span 2.8mm, IPC Medium Density"
  rrect17% 1x0.6 smd: 1(-1.375,0.95) 2(-1.375,0) 3(-1.375,-0.95) 4(1.375,-0.95) 5(1.375,0.95)
  silkscreen extent -0.25,-1.55 0.25,1.55, body extent -1.42,-1.46 1.42,1.46, height 1.09
DBZ0003A_N [mm] "SOT23, 3-Leads, Body 2.9x1.3mm, Pitch 0.95mm, Lead Span 2.4mm, IPC Medium Density"
  rrect17% 1x0.6 smd: 1(-1.2,0.95) 2(-1.2,-0.95) 3(1.2,0)
  silkscreen extent 0.2,-1.5 0.7,1.5, body extent -1.26,-1.46 1.26,1.46, height 0.98
DRV0006A [mm] "SON, 6-Leads, Body 2x2mm, Pitch 0.65mm, Thermal Pad 1.6x1mm, TI Recommended"
  rrect33% 0.45x0.3 smd: 1(-0.975,0.65) 2(-0.975,0) 3(-0.975,-0.65) 4(0.975,-0.65) 5(0.975,0) 6(0.975,0.65)
  rrect10% 1x1.6 smd paste-0.5: 7(0,0)
  silkscreen extent -1.05,-1.2 1.05,1.2, body extent -1.05,-1.05 1.05,1.05, height 0.81
ESD_OVERLAY_SMALL [mil]
  silkscreen extent -62,-48 64,61
FCC_disclaimer [mil]
FP-61300821121_HDR8-MFG [mm]
  rrect6% 1.7x1.7 hole 1.1 paste-1000 mask+0: 1(-3.81,-1.27)
  round 1.7 hole 1.1 paste-1000 mask+0: 2(-3.81,1.27) 3(-1.27,-1.27) 4(-1.27,1.27) 5(1.27,-1.27) 6(1.27,1.27) 7(3.81,-1.27) 8(3.81,1.27)
  body extent -5.33,-2.72 5.33,2.72, height 0.25
IEC_HOTSURFACE_SMALL [mil]
  silkscreen extent -107,-93 107,92
KTT0002A [mm] "TO-263-2"
  rrect10% 3.82x1.05 smd: 1(-6.9,2.54) 3(-6.9,-2.54)
  rrect1% 7.48x8.55 smd paste-4.2: 2(3.4,0)
  body extent -8.03,-5.08 7.05,5.08, height 4.67
NLCV25 [mm] "TDK"
  rect 1x1.5 smd: 1(-1.25,0) 2(1.25,0)
  body extent -1.35,-1.05 1.35,1.05, height 1.9
"NY PMS 256 0025 PH" [mm] "Machine Screw Pan Phillips 2-56"
  round 2 hole 2.45 unplated mask+0.381: ""(0,0)
  body extent -2.12,-2.12 2.12,2.12, height 1.45
PB-FREE_OVERLAY_SMALL [mil]
  silkscreen extent -46,-46 46,46
POWERDI123 [mm] "Diodes Inc recommended land pattern, document number DS30628 Rev. 6-2"
  rect 2.2x1.4 smd: 1(-1.275,0)
  rect 0.9x1.4 smd: 2(1.275,0)
  silkscreen extent -3.1,-1.09 1.76,1.09, body extent -2.38,-0.97 1.52,0.96, height 1
PT0048A_N [mm] "Thin QFP, 48-Leads, Body 7x7mm, Pitch 0.5mm, IPC Medium Density"
  oval 1.45x0.3 smd: 1(-4.225,2.75) 2(-4.225,2.25) 3(-4.225,1.75) 4(-4.225,1.25) 5(-4.225,0.75) 6(-4.225,0.25) 7(-4.225,-0.25) 8(-4.225,-0.75) 9(-4.225,-1.25) 10(-4.225,-1.75) 11(-4.225,-2.25) 12(-4.225,-2.75) 25(4.225,-2.75) 26(4.225,-2.25) 27(4.225,-1.75) 28(4.225,-1.25) 29(4.225,-0.75) 30(4.225,-0.25) 31(4.225,0.25) 32(4.225,0.75) 33(4.225,1.25) 34(4.225,1.75) 35(4.225,2.25) 36(4.225,2.75)
  oval 0.3x1.45 smd: 13(-2.75,-4.225) 14(-2.25,-4.225) 15(-1.75,-4.225) 16(-1.25,-4.225) 17(-0.75,-4.225) 18(-0.25,-4.225) 19(0.25,-4.225) 20(0.75,-4.225) 21(1.25,-4.225) 22(1.75,-4.225) 23(2.25,-4.225) 24(2.75,-4.225) 37(2.75,4.225) 38(2.25,4.225) 39(1.75,4.225) 40(1.25,4.225) 41(0.75,4.225) 42(0.25,4.225) 43(-0.25,4.225) 44(-0.75,4.225) 45(-1.25,4.225) 46(-1.75,4.225) 47(-2.25,4.225) 48(-2.75,4.225)
  silkscreen extent -4.35,-3.1 3.1,3.57, body extent -4.51,-4.51 4.51,4.51, height 1.5
RGZ0048L [mm] "QFN, 48-Leads, Body 7x7mm, Pitch 0.5mm, Thermal Pad 4.975x4.6mm, TI Recommended"
  rrect42% 0.6x0.24 smd: 1(-3.4,2.75) 2(-3.4,2.25) 3(-3.4,1.75) 4(-3.4,1.25) 5(-3.4,0.75) 6(-3.4,0.25) 7(-3.4,-0.25) 8(-3.4,-0.75) 9(-3.4,-1.25) 10(-3.4,-1.75) 11(-3.4,-2.25) 12(-3.4,-2.75) 25(3.4,-2.75) 26(3.4,-2.25) 27(3.4,-1.75) 28(3.4,-1.25) 29(3.4,-0.75) 30(3.4,-0.25) 31(3.4,0.25) 32(3.4,0.75) 33(3.4,1.25) 34(3.4,1.75) 35(3.4,2.25) 36(3.4,2.75)
  rrect42% 0.24x0.6 smd: 13(-2.75,-3.4) 14(-2.25,-3.4) 15(-1.75,-3.4) 16(-1.25,-3.4) 17(-0.75,-3.4) 18(-0.25,-3.4) 19(0.25,-3.4) 20(0.75,-3.4) 21(1.25,-3.4) 22(1.75,-3.4) 23(2.25,-3.4) 24(2.75,-3.4) 37(2.75,3.4) 38(2.25,3.4) 39(1.75,3.4) 40(1.25,3.4) 41(0.75,3.4) 42(0.25,3.4) 43(-0.25,3.4) 44(-0.75,3.4) 45(-1.25,3.4) 46(-1.75,3.4) 47(-2.25,3.4) 48(-2.75,3.4)
  rrect50% 1.37x1.28 on Top Paste: 49(-1.382,1.48) 49(-1.382,0) 49(-1.382,-1.48) 49(0.188,1.48) 49(0.188,0) 49(0.188,-1.48) 49(1.758,1.48) 49(1.758,0) 49(1.758,-1.48)
  rrect2% 4.975x4.6 smd paste-2.575: 49(0.188,0)
  silkscreen extent -3.65,-3.65 3.65,3.65, body extent -3.5,-3.5 3.5,3.5, height 1
SDR0604 [mm] "BOURNS"
  rect 2.1x5.8 smd: 1(-1.95,0) 2(1.95,0)
  body extent -2.9,-2.9 2.9,2.9, height 4.8
SMB-BI [mil] "Molded Diode, 2-Leads, Body 5.4x3.6mm, IPC Medium Density, based on OnSemi component dimensions"
  rect 85x107.99 smd: 1(-87.01,0) 2(87.01,0)
  silkscreen extent -125,-79 125,79, body extent -104,-73 104,73, height 89
SOT-23 [mm] "SOT23, 3-Leads, Body 2.9x1.3mm, Pitch 0.95mm, Lead Span 2.5mm, IPC Medium Density"
  rrect50% 1x0.6 smd: 1(-1.2,0.95) 2(-1.2,-0.95) 3(1.2,0)
  silkscreen extent -1.62,-1.5 0.7,1.5, body extent -1.16,-1.45 1.21,1.45, height 1
SW_434121025816 [mm] "SMD, 2-Leads, Body 6x3.9mm, Pitch 6.5mm"
  rect 1.5x1.4 smd: 1(-3.25,0) 2(3.25,0)
  silkscreen extent -3,-1.95 3,1.95, body extent -3.65,-1.95 3.65,1.95, height 2.5
WEEE_Minimum [mil] "WEEElie bin"
  silkscreen extent -95,-172 99,104
WL-SMCW_GREEN [mm] "WURTH"
  rect 0.8x0.8 smd: 1(-0.8,0) 2(0.8,0)
  silkscreen extent -1.9,-0.8 1.2,0.8, body extent -0.85,-0.45 0.85,0.45, height 0.8
WURTH_61300211121 [mm] "Header, 2.54mm, 2x1, TH"
  rrect50% 1.65x1.65 hole 1.15: 1(-1.27,0)
  round 1.65 hole 1.15: 2(1.27,0)
  body extent -2.54,-1.27 2.54,1.27, height 8.54
WURTH_61300411121 [mm] "Header, 2.54mm, 4x1, TH"
  rrect50% 1.65x1.65 hole 1.15: 1(-3.81,0)
  round 1.65 hole 1.15: 2(-1.27,0) 3(1.27,0) 4(3.81,0)
  body extent -5.08,-1.27 5.08,1.27, height 8.54
Wurth_61300511121 [mm] "Header, 2.54mm, 5x1, TH"
  rrect50% 1.65x1.65 hole 1.1: 1(-5.08,0)
  round 1.65 hole 1.1: 2(-2.54,0) 3(0,0) 4(2.54,0) 5(5.08,0)
  body extent -6.35,-1.27 6.35,1.27, height 8.54
YXJ_1600X2500 [mm] "TH, 2-Leads, Dia 16mm, Pin Spacing 7.5mm"
  rrect6% 1.55x1.55 hole 1.05: 1(-3.75,0)
  round 1.55 hole 1.05: 2(3.75,0)
  silkscreen extent -8.25,-8.25 8.25,8.25, body extent -8.25,-8.25 8.26,8.25, height 27.01

## Part data
C1 C2: library part CMP-0009783-2, "CAP ALUM 390UF 20% 100V THRUHOLE", Cap_Case=16x257, Manufacturer="Panasonic Electronic Components", Supplier Part Number 1=PCE5237-ND, Tolerance_%=20%, Value1="0.025 ohm", Value2=100V, ValueDisplayed=390uF, AEC Category=Q200, AEC Grade=N/A, AEC Qualified=N, Cap_F=390µF, ComponentLink1Description="Datasheet link", ComponentLink1URL=http://www.rubycon.co.jp/en/catalog/e_pdfs/aluminum/e_yxj.pdf, CompType=Capacitor, ESR_ohm=0.025, IRMS_A=2.5A, LatestRevisionDate=2017-03-09, MountType=TH, PackageReference=D16xL27mm, PartNumber=EEU-FS2A391, Polarized=Y, Publisher="Texas Instruments", RoHS=Y, Series=YXJ, SizeArea_mm2=256, SizeAreaWB_mm2=324, SizeX_mm=16, SizeY_mm=16, SizeZ_mm=27, Supplier 1=Digi-Key, Supplier 2=Newark, Supplier 3=Farnell, TaMax_C=105°C, TaMin_C=-40°C, Technology=AL, U/M=EA, VDC_V=100V
C3: library part CMP-0008709-2, "CAP, CERM, 0.1 uF, 100 V, +/- 10%, X7R, 1206", Cap_Case=1206_180, Manufacturer=TDK, Supplier Part Number 1=445-1377-1-ND, TempCo=X7R, Tolerance_%=10%, Value1="0.030343 ohm", Value2=100V, ValueDisplayed=0.1uF, AEC Category=Q200, AEC Grade=N/A, AEC Qualified=N, Cap_F=100nF, ComponentLink1Description="Datasheet link", ComponentLink1URL=https://product.tdk.com/en/search/capacitor/ceramic/mlcc/info?part_no=C3216X7R2A104K160AA, CompType=Capacitor, ESR_ohm=0.030343, IRMS_A=1.33802A, LatestRevisionDate=2017-03-09, MountType=SMT, PackageReference=1206, PartNumber=C3216X7R2A104K160AA, Polarized=N, Published=2008-06-19, Publisher="Texas Instruments", RoHS=Y, SizeArea_mm2=5.12, SizeAreaWB_mm2=10.92, SizeX_mm=3.2, SizeY_mm=1.6, SizeZ_mm=1.8, Supplier 1=Digi-Key, Supplier 2=Mouser, Supplier Part Number 2=810-C3216X7R2A104K160AA, TaMax_C=125°C, TaMin_C=-55°C, Technology=Ceramic, U/M=EA, VDC_V=100V
C4 C10 C11 C12: library part CMP-0008756-2, "CAP CER 2.2UF 100V X7R 1206", Cap_Case=1206, Manufacturer="Samsung Electro-Mechanics", Supplier Part Number 1=1276-3138-1-ND, TempCo=X7R, Tolerance_%=10%, Value1=Unknown, Value2=100V, ValueDisplayed=2.2uF, AEC Category=Q200, AEC Qualified=?, Cap_F=2.2uF, ComponentLink1Description="Datasheet link", ComponentLink1URL=http://www.yageo.com/documents/recent/UPY-GPHC_X7R_6.3V-to-50V_7.pdf, CompType=Capacitor, LatestRevisionDate=2017-03-09, MountType=SMT, PackageReference=1206, PartNumber=CL31B225KCHSNNE, Polarized=N, Published=2008-06-19, Publisher="Texas Instruments", RoHS=Y, SizeArea_mm2=5.12, SizeAreaWB_mm2=10.92, SizeX_mm=3.2, SizeY_mm=1.6, SizeZ_mm=1.35, Supplier 1=Digi-Key, Supplier 2=Mouser, Supplier 3=Farnell, TaMax_C=125°C, TaMin_C=-55°C, Technology=Ceramic, U/M=EA, VDC_V=100V
C5: library part CMP-0009304-2, "CAP, CERM, 10 uF, 100 V, +/- 20%, X7R, 2220", Cap_Case=2220, Manufacturer=AVX, Supplier Part Number 1=478-9622-1-ND, TempCo=X7R, Tolerance_%=20%, Value1=Unknown, Value2=100V, ValueDisplayed=10uF, AEC Category=Q200, AEC Grade=N/A, AEC Qualified=N, Cap_F=10µF, ComponentLink1Description="Datasheet link", ComponentLink1URL=http://datasheets.avx.com/X7RDielectric.pdf, CompType=Capacitor, LatestRevisionDate=2017-03-09, MountType=SMT, PackageReference=2220, PartNumber=22201C106MAT2A, Polarized=N, Published=2008-06-19, Publisher="Texas Instruments", RoHS=Y, SizeArea_mm2=28.5, SizeAreaWB_mm2=53.9, SizeX_mm=5.7, SizeY_mm=5, SizeZ_mm=2.8, Supplier 1=Digi-Key, Supplier 2=Mouser, Supplier Part Number 2=581-22201C106MAT2A, TaMax_C=125°C, TaMin_C=-55°C, Technology=Ceramic, U/M=EA
C6 C28 C30: library part CMP-0007469-4, "CAP, CERM, 0.1 uF, 100 V, +/- 10%, X7R, 0603", Cap_Case=0603, Manufacturer=MuRata, Supplier Part Number 1=490-3285-1-ND, TempCo=X7R, Tolerance_%=10%, Value1=Unknown, Value2=100V, ValueDisplayed=0.1uF, AEC Category=Q200, AEC Qualified=?, Cap_F=100nF, ComponentLink1Description="Datasheet link", ComponentLink1URL=http://search.murata.co.jp/Ceramy/PnsearchViewAction.do?HnOFG=ON&HnNFG=ON&SEL_CNT=50&sLang=en&sKey=GRM188R72A104KA35D&x=9&y=9&search=startwith, CompType=Capacitor, LatestRevisionDate=2017-03-09, MountType=SMT, PackageReference=0603, PartNumber=GRM188R72A104KA35D, Polarized=N, Published=2008-06-19, Publisher="Texas Instruments", RoHS=Y, SizeArea_mm2=1.28, SizeAreaWB_mm2=4.68, SizeX_mm=1.6, SizeY_mm=0.8, SizeZ_mm=1, Supplier 1=Digi-Key, Supplier 2=Mouser, Supplier 3=Farnell, Supplier Part Number 2=81-GRM188R72A104KA35, Supplier Part Number 3=1828921, TaMax_C=125°C, TaMin_C=-55°C, Technology=Ceramic, U/M=EA, VDC_V=100V
C7 C31: library part CMP-0086009-1, "CAP, CERM, 1 µF, 16 V,+/- 20%, X5R, 0402", Cap_Case=0402, Manufacturer="Samsung Electro-Mechanics", TempCo=X5R, Tolerance_%=20%, Value2=16V, ValueDisplayed=1µF, AEC Category=Q200, AEC Grade=N/A, AEC Qualified=N, Cap_F=1µF, ComponentLink1Description="Datasheet link", ComponentLink1URL=http://www.samsungsem.com/kr/support/library/product-catalog/__icsFiles/afieldfile/2018/11/28/MLCC.pdf, CompType=Capacitor, MountType=SMT, PackageReference=0402, PartNumber=CL05A105MO5NNNC, Polarized=N, RoHS=Y, SizeArea_mm2=0.5, SizeAreaWB_mm2=3, SizeX_mm=1, SizeY_mm=0.5, SizeZ_mm=0.6, TaMax_C=85°C, TaMin_C=-55°C, Technology=Ceramic, U/M=EA, VDC_V=16V
C8: library part CMP-0008373-2, "CAP, CERM, 0.047 uF, 100 V, +/- 10%, X7R, 0805", Cap_Case=0805, Manufacturer=MuRata, Supplier Part Number 1=490-3325-1-ND, TempCo=X7R, Tolerance_%=10%, Value1=Unknown, Value2=100V, ValueDisplayed=0.047uF, AEC Category=Q200, AEC Qualified=?, Cap_F=47nF, ComponentLink1Description="Datasheet link", ComponentLink1URL=http://search.murata.co.jp/Ceramy/PnsearchViewAction.do?HnOFG=ON&HnNFG=ON&SEL_CNT=50&sLang=en&sKey=GRM21BR72A473KA01L&x=9&y=9&search=startwith, CompType=Capacitor, LatestRevisionDate=2017-03-09, MountType=SMT, PackageReference=0805, PartNumber=GRM21BR72A473KA01L, Polarized=N, Published=2008-06-19, Publisher="Texas Instruments", RoHS=Y, SizeArea_mm2=2.5, SizeAreaWB_mm2=6.75, SizeX_mm=2, SizeY_mm=1.25, SizeZ_mm=1.45, Supplier 1=Digi-Key, Supplier 2=Mouser, Supplier 3=Farnell, Supplier Part Number 2=81-GRM21BR72A473KA1L, Supplier Part Number 3=1403974, TaMax_C=125°C, TaMin_C=-55°C, Technology=Ceramic, U/M=EA, VDC_V=100V
C9: library part CMP-0006372-2, "CAP, CERM, 1 uF, 6.3 V, +/- 20%, X5R, 0402", Cap_Case=0402, Manufacturer=MuRata, Supplier Part Number 1=490-10006-1-ND, TempCo=X5R, Tolerance_%=20%, Value1=Unknown, Value2=6.3V, ValueDisplayed=1uF, AEC Category=Q200, AEC Qualified=?, Cap_F=1µF, ComponentLink1Description="Datasheet link", ComponentLink1URL=http://psearch.murata.com/capacitor/product/GRM152R60J105ME15%23.pdf, CompType=Capacitor, LatestRevisionDate=2017-03-09, MountType=SMT, PackageReference=0402, PartNumber=GRM152R60J105ME15D, Polarized=N, Published=2008-06-19, Publisher="Texas Instruments", RoHS=Y, SizeArea_mm2=0.5, SizeAreaWB_mm2=3, SizeX_mm=1, SizeY_mm=0.5, SizeZ_mm=0.6, Supplier 1=Digi-Key, Supplier 2=Mouser, Supplier Part Number 2=81-GRM152R60J105ME5D, TaMax_C=85°C, TaMin_C=-55°C, Technology=Ceramic, U/M=EA, VDC_V=6.3V
C13 C14 C15 C16 C17 C18: library part CMP-0008756-2, "CAP CER 3900PF 100V X7R 1206", Cap_Case=1206, Manufacturer="AVX Corporation", Supplier Part Number 1=478-6364-1-ND, TempCo=X7R, Tolerance_%=10%, Value1=Unknown, Value2=100V, ValueDisplayed=3900pF, AEC Category=Q200, AEC Qualified=?, Cap_F=3.9nF, ComponentLink1Description="Datasheet link", ComponentLink1URL=http://www.yageo.com/documents/recent/UPY-GPHC_X7R_6.3V-to-50V_7.pdf, CompType=Capacitor, LatestRevisionDate=2017-03-09, MountType=SMT, PackageReference=1206, PartNumber=12061C392KAZ2A, Polarized=N, Published=2008-06-19, Publisher="Texas Instruments", RoHS=Y, SizeArea_mm2=5.12, SizeAreaWB_mm2=10.92, SizeX_mm=3.2, SizeY_mm=1.6, SizeZ_mm=1.35, Supplier 1=Digi-Key, Supplier 2=Mouser, Supplier 3=Farnell, TaMax_C=125°C, TaMin_C=-55°C, Technology=Ceramic, U/M=EA, VDC_V=100V
C19 C33 C35 C39 C40 C44 C45: library part CMP-0006350-2, "CAP, CERM, 0.1 uF, 10 V, +/- 10%, X7R, AEC-Q200 Grade 1, 0402", Cap_Case=0402, Manufacturer=MuRata, Supplier Part Number 1=81-GCM155R71A104K5D, TempCo=X7R, Tolerance_%=10%, Value1=Unknown, Value2=10V, ValueDisplayed=0.1uF, AEC Category=Q200, AEC Grade=1, AEC Qualified=Y, Cap_F=100nF, ComponentLink1Description="Datasheet link", ComponentLink1URL=http://search.murata.co.jp/Ceramy/image/img/A01X/G101/ENG/GCM155R71A104KA55-01.pdf, CompType=Capacitor, LatestRevisionDate=2017-03-09, MountType=SMT, PackageReference=0402, PartNumber=GCM155R71A104KA55D, Polarized=N, Published=2008-06-19, Publisher="Texas Instruments", RoHS=Y, SizeArea_mm2=0.5, SizeAreaWB_mm2=3, SizeX_mm=1, SizeY_mm=0.5, SizeZ_mm=0.6, Supplier 1=Mouser, TaMax_C=125°C, TaMin_C=-55°C, Technology=Ceramic, U/M=EA, VDC_V=10V
C20 C22 C46 C47 C48 C49: library part CMP-0064933-1, "CAP, CERM, 1000 pF, 50 V,+/- 10%, X7R, 0603", Cap_Case=0603, Manufacturer="Wurth Elektronik", Supplier Part Number 1=732-8001-1-ND, TempCo=X7R, Tolerance_%=10%, Value1=Unknown, Value2=50V, ValueDisplayed=1000pF, AEC Category=Q200, AEC Grade=N/A, AEC Qualified=N, Cap_F=1nF, ComponentLink1Description="Datasheet link", ComponentLink1URL=http://katalog.we-online.de/pbs/datasheet/885012206083.pdf, CompType=Capacitor, LatestRevisionDate=2017-06-05, MountType=SMT, PackageReference=0603, PartNumber=885012206083, Polarized=N, Published=2008-06-19, Publisher="Texas Instruments", RoHS=Y, SizeArea_mm2=1.28, SizeAreaWB_mm2=4.68, SizeX_mm=1.6, SizeY_mm=0.8, SizeZ_mm=1, Supplier 1=Digi-Key, Supplier 2=Newark, Supplier 3=Mouser, Supplier Part Number 2=75Y6033, Supplier Part Number 3=710-885012206083, TaMax_C=125°C, TaMin_C=-55°C, Technology=Ceramic, U/M=EA, VDC_V=50V
C21: library part CMP-0006688-2, "CAP, CERM, 3300 pF, 50 V, +/- 10%, X7R, 0402", Cap_Case=0402, Manufacturer=MuRata, Supplier Part Number 1=490-3248-1-ND, TempCo=X7R, Tolerance_%=10%, Value1=Unknown, Value2=50V, ValueDisplayed=3300pF, AEC Category=Q200, AEC Qualified=?, Cap_F=3.3nF, ComponentLink1Description="Datasheet link", ComponentLink1URL=http://search.murata.co.jp/Ceramy/PnsearchViewAction.do?HnOFG=ON&HnNFG=ON&SEL_CNT=50&sLang=en&sKey=GRM155R71H332KA01D&x=9&y=9&search=startwith, CompType=Capacitor, LatestRevisionDate=2017-03-09, MountType=SMT, PackageReference=0402, PartNumber=GRM155R71H332KA01D, Polarized=N, Published=2008-06-19, Publisher="Texas Instruments", RoHS=Y, SizeArea_mm2=0.5, SizeAreaWB_mm2=3, SizeX_mm=1, SizeY_mm=0.5, SizeZ_mm=0.6, Supplier 1=Digi-Key, Supplier 2=Mouser, Supplier Part Number 2=81-GRM36X332K50, TaMax_C=125°C, TaMin_C=-55°C, Technology=Ceramic, U/M=EA, VDC_V=50V
C23 C36 C41 C42 C43: library part CMP-0006638-2, "CAP, CERM, 1000 pF, 16 V, +/- 10%, X7R, 0402", Cap_Case=0402, Manufacturer=MuRata, Supplier Part Number 1=GRM155R71C102KA01D-ND, TempCo=X7R, Tolerance_%=10%, Value1=Unknown, Value2=16V, ValueDisplayed=1000pF, AEC Category=Q200, AEC Qualified=?, Cap_F=1nF, ComponentLink1Description="Datasheet link", ComponentLink1URL=http://search.murata.co.jp/Ceramy/PnsearchViewAction.do?HnOFG=ON&HnNFG=ON&SEL_CNT=50&sLang=en&sKey=GRM155R71C102KA01D&x=9&y=9&search=startwith, CompType=Capacitor, LatestRevisionDate=2017-03-09, MountType=SMT, PackageReference=0402, PartNumber=GRM155R71C102KA01D, Polarized=N, Published=2008-06-19, Publisher="Texas Instruments", RoHS=Y, SizeArea_mm2=0.5, SizeAreaWB_mm2=3, SizeX_mm=1, SizeY_mm=0.5, SizeZ_mm=0.6, Supplier 1=Digi-Key, Supplier 2=Mouser, Supplier Part Number 2=81-GRM155R71C102KA1D, TaMax_C=125°C, TaMin_C=-55°C, Technology=Ceramic, U/M=EA, VDC_V=16V
C24: library part CMP-0079993-1, "CAP, CERM, 0.01 µF, 100 V,+/- 10%, X7R, 0603", Cap_Case=0603, Manufacturer="Wurth Elektronik", Supplier Part Number 1=45AC8565, TempCo=X7R, Tolerance_%=10%, Value2=100V, ValueDisplayed=0.01µF, AEC Category=Q200, AEC Grade=N/A, AEC Qualified=N, Cap_F=10nF, ComponentLink1Description="Datasheet link", ComponentLink1URL=http://katalog.we-online.de/pbs/datasheet/885012206114.pdf, CompType=Capacitor, MountType=SMT, PackageReference=0603, PartNumber=885012206114, Polarized=N, RoHS=Y, SizeArea_mm2=1.28, SizeAreaWB_mm2=4.68, SizeX_mm=1.6, SizeY_mm=0.8, SizeZ_mm=1, Supplier 1=Newark, Supplier 2=Farnell, Supplier Part Number 2=2812368, TaMax_C=105°C, TaMin_C=-55°C, Technology=Ceramic, U/M=EA, VDC_V=100V
C25: library part CMP-0007207-4, "CAP, CERM, 3000 pF, 50 V, +/- 5%, C0G/NP0, 0603", Cap_Case=0603, Manufacturer=MuRata, Supplier Part Number 1=GRM1885C1H302JA01D-ND, TempCo=C0G/NP0, Tolerance_%=5%, Value1=Unknown, Value2=50V, ValueDisplayed=3000pF, AEC Category=Q200, AEC Qualified=?, Cap_F=3nF, ComponentLink1Description="Datasheet link", ComponentLink1URL=http://search.murata.co.jp/Ceramy/PnsearchViewAction.do?HnOFG=ON&HnNFG=ON&SEL_CNT=50&sLang=en&sKey=GRM1885C1H302JA01D&x=9&y=9&search=startwith, CompType=Capacitor, LatestRevisionDate=2017-03-09, MountType=SMT, PackageReference=0603, PartNumber=GRM1885C1H302JA01D, Polarized=N, Published=2008-06-19, Publisher="Texas Instruments", RoHS=Y, SizeArea_mm2=1.28, SizeAreaWB_mm2=4.68, SizeX_mm=1.6, SizeY_mm=0.8, SizeZ_mm=1, Supplier 1=Digi-Key, Supplier 2=Mouser, Supplier Part Number 2=81-GRM1885C1H302JA1D, TaMax_C=125°C, TaMin_C=-55°C, Technology=Ceramic, U/M=EA, VDC_V=50V
C26: library part CMP-0007877-2, "CAP, CERM, 2.2 uF, 50 V, +/- 10%, X7R, 0805", Cap_Case=0805, Manufacturer=TDK, Supplier Part Number 1=445-5968-1-ND, TempCo=X7R, Tolerance_%=10%, Value1="0.00366 ohm", Value2=50V, ValueDisplayed=2.2uF, AEC Category=Q200, AEC Grade=N/A, AEC Qualified=N, Cap_F=2.2µF, ComponentLink1Description="Datasheet link", ComponentLink1URL=https://product.tdk.com/en/search/capacitor/ceramic/mlcc/info?part_no=C2012X7R1H225K125AC, CompType=Capacitor, ESR_ohm=3.66m, IRMS_A=3.41207A, LatestRevisionDate=2017-03-09, MountType=SMT, PackageReference=0805, PartNumber=C2012X7R1H225K125AC, Polarized=N, Published=2008-06-19, Publisher="Texas Instruments", RoHS=Y, SizeArea_mm2=2.5, SizeAreaWB_mm2=6.75, SizeX_mm=2, SizeY_mm=1.25, SizeZ_mm=1.45, Supplier 1=Digi-Key, Supplier 2=Newark, Supplier 3=Farnell, Supplier Part Number 2=04X3290, Supplier Part Number 3=2346945, TaMax_C=125°C, TaMin_C=-55°C, Technology=Ceramic, U/M=EA, VDC_V=50V
C27 C29: library part CMP-0008725-2, "CAP, CERM, 3.3 uF, 100 V, +/- 20%, X7S, 1206_190", Cap_Case=1206_190, Manufacturer=TDK, Supplier Part Number 1=445-9234-1-ND, TempCo=X7S, Tolerance_%=20%, Value1="0.003048 ohm", Value2=100V, ValueDisplayed=3.3uF, AEC Category=Q200, AEC Grade=N/A, AEC Qualified=N, Cap_F=3.3µF, ComponentLink1Description="Datasheet link", ComponentLink1URL=https://product.tdk.com/en/search/capacitor/ceramic/mlcc/info?part_no=C3216X7S2A335M160AB, CompType=Capacitor, ESR_ohm=3.048m, IRMS_A=4.15703A, LatestRevisionDate=2017-03-09, MountType=SMT, PackageReference=1206_190, PartNumber=C3216X7S2A335M160AB, Polarized=N, Published=2008-06-19, Publisher="Texas Instruments", RoHS=Y, SizeArea_mm2=5.12, SizeAreaWB_mm2=10.92, SizeX_mm=3.2, SizeY_mm=1.6, SizeZ_mm=1.9, Supplier 1=Digi-Key, Supplier 2=Newark, Supplier Part Number 2=46W3988, TaMax_C=125°C, TaMin_C=-55°C, Technology=Ceramic, U/M=EA, VDC_V=100V
C32: library part CMP-0006600-2, "CAP CER 0.47UF 16V X5R 0402", Cap_Case=0402, Manufacturer="TDK Corporation", Supplier Part Number 1=445-13183-1-ND, TempCo=X5R, Tolerance_%=10%, Value1=Unknown, Value2=16V, ValueDisplayed=0.47uF, AEC Category=Q200, AEC Qualified=?, Cap_F=470nF, ComponentLink1Description="Datasheet link", ComponentLink1URL=http://psearch.murata.com/capacitor/product/GRM155R61C474KE01%23.pdf, CompType=Capacitor, LatestRevisionDate=2017-03-09, MountType=SMT, PackageReference=0402, PartNumber=CGB2A1X5R1C474K033BC, Polarized=N, Published=2008-06-19, Publisher="Texas Instruments", RoHS=Y, SizeArea_mm2=0.5, SizeAreaWB_mm2=3, SizeX_mm=1, SizeY_mm=0.5, SizeZ_mm=0.6, Supplier 1=Digikey, TaMax_C=85°C, TaMin_C=-55°C, Technology=Ceramic, U/M=EA, VDC_V=16V
C34: library part CMP-0085855-1, "CAP, CERM, 10 µF, 10 V,+/- 10%, X5R, 0603", Cap_Case=0603, Manufacturer=MuRata, TempCo=X5R, Tolerance_%=10%, Value2=10V, ValueDisplayed=10µF, AEC Category=Q200, AEC Grade=N/A, AEC Qualified=N, Cap_F=10µF, ComponentLink1Description="Datasheet link", ComponentLink1URL=https://search.murata.co.jp/Ceramy/image/img/A01X/G101/ENG/GRM188R61A106KE69-01.pdf, CompType=Capacitor, Green_EU RoHS=Passed, Green_EU RoHS-2=Incomplete, Green_Lifecycle=Active, Green_REACh=Incomplete, MountType=SMT, PackageReference=0603, PartNumber=GRM188R61A106KE69D, Polarized=N, RoHS=Y, SizeArea_mm2=1.28, SizeAreaWB_mm2=4.68, SizeX_mm=1.6, SizeY_mm=0.8, SizeZ_mm=1, TaMax_C=85°C, TaMin_C=-55°C, Technology=Ceramic, U/M=EA, VDC_V=10V
C37: library part CMP-0006222-2, "CAP, CERM, 2.2 uF, 10 V, +/- 20%, X5R, 0402", Cap_Case=0402, Manufacturer="Wurth Elektronik", Supplier Part Number 1=710-885012105013, TempCo=X5R, Tolerance_%=20%, Value1=Unknown, Value2=10V, ValueDisplayed=2.2uF, AEC Category=Q200, AEC Grade=N/A, AEC Qualified=N, Cap_F=2.2µF, ComponentLink1Description="Datasheet link", ComponentLink1URL=http://katalog.we-online.de/pbs/datasheet/885012105013.pdf, CompType=Capacitor, LatestRevisionDate=2017-03-09, MountType=SMT, PackageReference=0402, PartNumber=885012105013, Polarized=N, Published=2008-06-19, Publisher="Texas Instruments", RoHS=Y, SizeArea_mm2=0.5, SizeAreaWB_mm2=3, SizeX_mm=1, SizeY_mm=0.5, SizeZ_mm=0.6, Supplier 1=Mouser, TaMax_C=85°C, TaMin_C=-55°C, Technology=Ceramic, U/M=EA, VDC_V=10V
C38: library part CMP-0008706-2, "CAP, CERM, 10 uF, 35 V, +/- 20%, X7R, 1206_190", Cap_Case=1206, Manufacturer=TDK, Supplier Part Number 1=445-8034-1-ND, TempCo=X7R, Tolerance_%=20%, Value1=Unknown, Value2=35V, ValueDisplayed=10uF, AEC Category=Q200, AEC Qualified=?, Cap_F=10µF, ComponentLink1Description="Datasheet link", ComponentLink1URL=http://product.tdk.com/en/catalog/datasheets/mlcc_commercial_general_en.pdf, CompType=Capacitor, LatestRevisionDate=2017-03-09, MountType=SMT, PackageReference=1206_190, PartNumber=C3216X7R1V106M160AC, Polarized=N, Published=2008-06-19, Publisher="Texas Instruments", RoHS=Y, SizeArea_mm2=5.12, SizeAreaWB_mm2=10.92, SizeX_mm=3.2, SizeY_mm=1.6, SizeZ_mm=1.9, Supplier 1=Digi-Key, Supplier 2=Newark, Supplier 3=Mouser, Supplier Part Number 2=04X3300, Supplier Part Number 3=810-C3216X7R1V106M, TaMax_C=125°C, TaMin_C=-55°C, Technology=Ceramic, U/M=EA, VDC_V=35V
D1: library part CMP-0005587-3, "Diode, TVS, Bi, 70 V, SMB", Manufacturer="Diodes Inc.", Value1=600W, AEC Category=Q101, AEC Qualified=?, ComponentLink1Description="Datasheet link", ComponentLink1URL=http://www.diodes.com/datasheets/ds19002.pdf, CompType=TVS, MountType=SMT, PackageReference=SMB, PartNumber=SMBJ70CA-13-F, Ppk=600W, RoHS=Y, SizeArea_mm2=21.336, SizeAreaWB_mm2=44.156, SizeX_mm=5.6, SizeY_mm=3.81, SizeZ_mm=2.6, VRWM=70V
D2 D3: library part CMP-0028517-1, "Diode, Schottky, 200 V, 1 A, PowerDI123", Manufacturer="Diodes Inc.", Supplier Part Number 1=DFLS1200DICT-ND, Value1=1A, Value2=0.85V, AEC Category=Q101, AEC Qualified=?, ComponentLink1Description="Datasheet link", ComponentLink1URL=http://www.diodes.com/datasheets/ds30628.pdf, CompType=Diode, Green_EU RoHS="Passed with Exemption", Green_EU RoHS-2=Passed, Green_Lifecycle=Active, Green_REACh=Passed, Io_A=1A, LatestRevisionDate=2017-05-08, MountType=SMT, PackageReference=PowerDI123, PartNumber=DFLS1200-7, Published=2008-06-26, Publisher="Texas Instruments", RJC_CperW=7, RoHS=Y, SizeArea_mm2=6.586, SizeAreaWB_mm2=13.066, SizeX_mm=3.7, SizeY_mm=1.78, SizeZ_mm=0.98, Supplier 1=Digi-Key, Supplier 2=Mouser, Supplier 3=Farnell, Supplier Part Number 2=621-DFLS1200-F, Supplier Part Number 3=1713890, TJmax_C=175°C, Type=Schottky, U/M=EA, Vf_V=8.5dV, Vr_V=200V
D4: library part CMP-0002905-1, "LED, Green, SMD", Color=Green, Manufacturer="Wurth Elektronik", PartNumber=150060GS75000, Supplier Part Number 1=732-4971-1-ND, Value1=W, Value2=3.2V, Angle=140, ComponentLink1Description="Datasheet link", ComponentLink1URL=http://katalog.we-online.de/led/datasheet/150060GS75000.pdf, CompType=LED, Io_A=20mA, LatestRevisionDate=2017-03-09, MountType=SMT, PackageReference=LED_0603, Published=2008-07-11, Publisher="Texas Instruments", RoHS=Y, Supplier 1=Digi-Key, Supplier 2=Newark, Supplier 3=Mouser, Supplier Part Number 2=95W3794, Supplier Part Number 3=710-150060GS75000, TJmax_C=85°C, Type=InGaN, U/M=EA, Vf_V=3.2V
D5: "LED RED CLEAR 0603 SMD", Color=Red, Manufacturer="Wurth Elektronics Inc", PartNumber=150060RS75000, Supplier Part Number 1=732-4978-1-ND, Value1=W, Value2=2V, Angle=140, ComponentLink1Description="Datasheet link", ComponentLink1URL="Visible Name Value Type    False ComponentLink1URL http://katalog.we-online.de/led/datasheet/150060GS75000.pdf STRING", CompType=LED, Io_A=0.02, LatestRevisionDate=2016-01-08, MountType=SMT, PackageReference=LED_0603, Published=2008-07-11, Publisher="Texas Instruments", RoHS=Y, Supplier 1=Digi-Key, Supplier 2=Mouser, Supplier 3=Farnell, Supplier Part Number 2=710-150060GS75000, Supplier Part Number 3=2322070, SymbolVersion=2008-11-06, TJmax_C=85, Type=InGaN, U/M=EA, Vf_V=3.2
D6: "LED YELLOW CLEAR 0603 SMD", Color=Yellow, Manufacturer="Wurth Elektronics Inc", PartNumber=150060YS75000, Supplier Part Number 1=732-4981-1-ND, Value1=W, Value2=2V, Angle=140, ComponentLink1Description="Datasheet link", ComponentLink1URL=http://katalog.we-online.de/led/datasheet/150060YS75000.pdf, CompType=LED, Io_A=0.02, LatestRevisionDate=2016-01-08, MountType=SMT, PackageReference=LED_0603, Published=2008-07-11, Publisher="Texas Instruments", RoHS=Y, Supplier 1=Digi-Key, Supplier 2=Mouser, Supplier 3=Farnell, Supplier Part Number 2=710-150060GS75000, Supplier Part Number 3=2322070, SymbolVersion=2008-11-06, TJmax_C=85, Type=InGaN, U/M=EA, Vf_V=2V
D7: "LED, Green, SMD", Color=Green, Manufacturer="Wurth Elektronics Inc", Supplier Part Number 1=732-4971-1-ND, Value1=W, Value2=3.2V, Angle=140, ComponentLink1Description="Datasheet link", ComponentLink1URL=http://katalog.we-online.de/led/datasheet/150060GS75000.pdf, CompType=LED, Io_A=0.02, LatestRevisionDate=2016-01-08, MountType=SMT, PackageReference=LED_0603, PartNumber=150060GS75000, Published=2008-07-11, Publisher="Texas Instruments", RoHS=Y, Supplier 1=Digi-Key, Supplier 2=Mouser, Supplier 3=Farnell, Supplier Part Number 2=710-150060GS75000, Supplier Part Number 3=2322070, SymbolVersion=2008-11-06, TJmax_C=85, Type=InGaN, U/M=EA, Vf_V=3.2
H1 H2: "MACHINE SCREW PAN PHILLIPS 2-56", Manufacturer="B&F Fastener Supply", Supplier Part Number 1=H530-ND, ComponentLink1Description="Datasheet Link", ComponentLink1URL=http://www.fasnetdirect.com/refguide/Nylpanms.pdf, CompType=Screw, LatestRevisionDate=2017-05-31, MountType=N/A, PackageReference="Machine Screw Pan Phillips 2-56", PartNumber="NY PMS 256 0025 PH", Publisher="Texas Instruments", RoHS=Y, Supplier 1=Digi-Key, SymbolCreator=a0412235, SymbolVersion=2013-06-24
J1 J2 J3 J5 J6: library part CMP-0054794-2, "Header, 2.54 mm, 2x1, Gold, TH", Color=Black, Manufacturer="Wurth Elektronik", Supplier Part Number 1=732-5315-ND, Cert_UL=Y, ClassName=Header, ComponentLink1Description="Datasheet URL", ComponentLink1URL=http://katalog.we-online.de/em/datasheet/6130xx11121.pdf, CompType=Header, ContactFinish=Gold, Gender=Male, Green_EU RoHS=Passed, Green_EU RoHS-2=Incomplete, Green_Lifecycle=Active, Green_REACh=Passed, MountType=TH, Orientation=Vertical, PackageReference="Header, 2.54mm, 2x1, TH", PartNumber=61300211121, PinCount=2, Pitch_mm=2.54, RoHS=Y, Row_Count=1, Shrouded=N, Supplier 1=Digi-Key, Supplier 2=Newark, Supplier 3=Mouser, Supplier Part Number 2=20X0948, Supplier Part Number 3=710-61300211121
J4 J8 J10: library part CMP-0054798-2, "Header, 2.54 mm, 4x1, Gold, TH", Color=Black, Manufacturer="Wurth Elektronik", Supplier Part Number 1=732-5317-ND, Cert_UL=Y, ClassName=Header, ComponentLink1Description="Datasheet URL", ComponentLink1URL=http://katalog.we-online.de/em/datasheet/6130xx11121.pdf, CompType=Header, ContactFinish=Gold, Gender=Male, MountType=TH, Orientation=Vertical, PackageReference="Header, 2.54mm, 4x1, TH", PartNumber=61300411121, PinCount=4, Pitch_mm=2.54, RoHS=Y, Row_Count=1, Shrouded=N, Supplier 1=Digi-Key, Supplier 2=Newark, Supplier 3=Farnell, Supplier Part Number 2=20X0951, Supplier Part Number 3=2356155
J7: library part CMP-0084909-1, "Header, 2.54mm, 5x1, Gold, TH", Color=Black, Current_A=3A, Manufacturer="Wurth Elektronik", Voltage_V=250V, ClassName=Header, ComponentLink1Description="Datasheet URL", ComponentLink1URL=https://katalog.we-online.de/em/datasheet/6130xx11121.pdf, CompType=Header, ContactFinish=Gold, Gender=Male, MountType=TH, Orientation=Vertical, PackageReference="Header, 2.54mm, 5x1, TH", PartNumber=61300511121, PinCount=5, Pitch_mm=2.54, RoHS=Y, Row_Count=1, Shrouded=N
J9: library part CMP-0087153-1, "CONN HEADER VERT 8POS 2.54MM", Current_A=3A, Manufacturer="Wurth Electronics", Voltage_V=250V, ComponentLink1Description=Datasheet, ComponentLink1URL=https://katalog.we-online.com/em/datasheet/6130xx21121.pdf, ContactFinish=Gold, PackageReference=HDR8, PartId=1, PartNumber=61300821121, PinCount=8, RoHS=TRUE, Row_Count=2, Symbol Name=SYM-61300821121